# Altium PCB MAX96724_EVB_revB.PcbDoc (part 1 of 2)
Units mm, origin at the board's own origin, x right, y up, seen from the top; angles counter-clockwise.
Board outline 80 x 80 mm, 4 copper layers (Top Layer, Mid Layer 1, Mid Layer 2, Bottom Layer), stack 1.586 mm thick; 167 components, 106 nets, 496 pads, 209 vias.
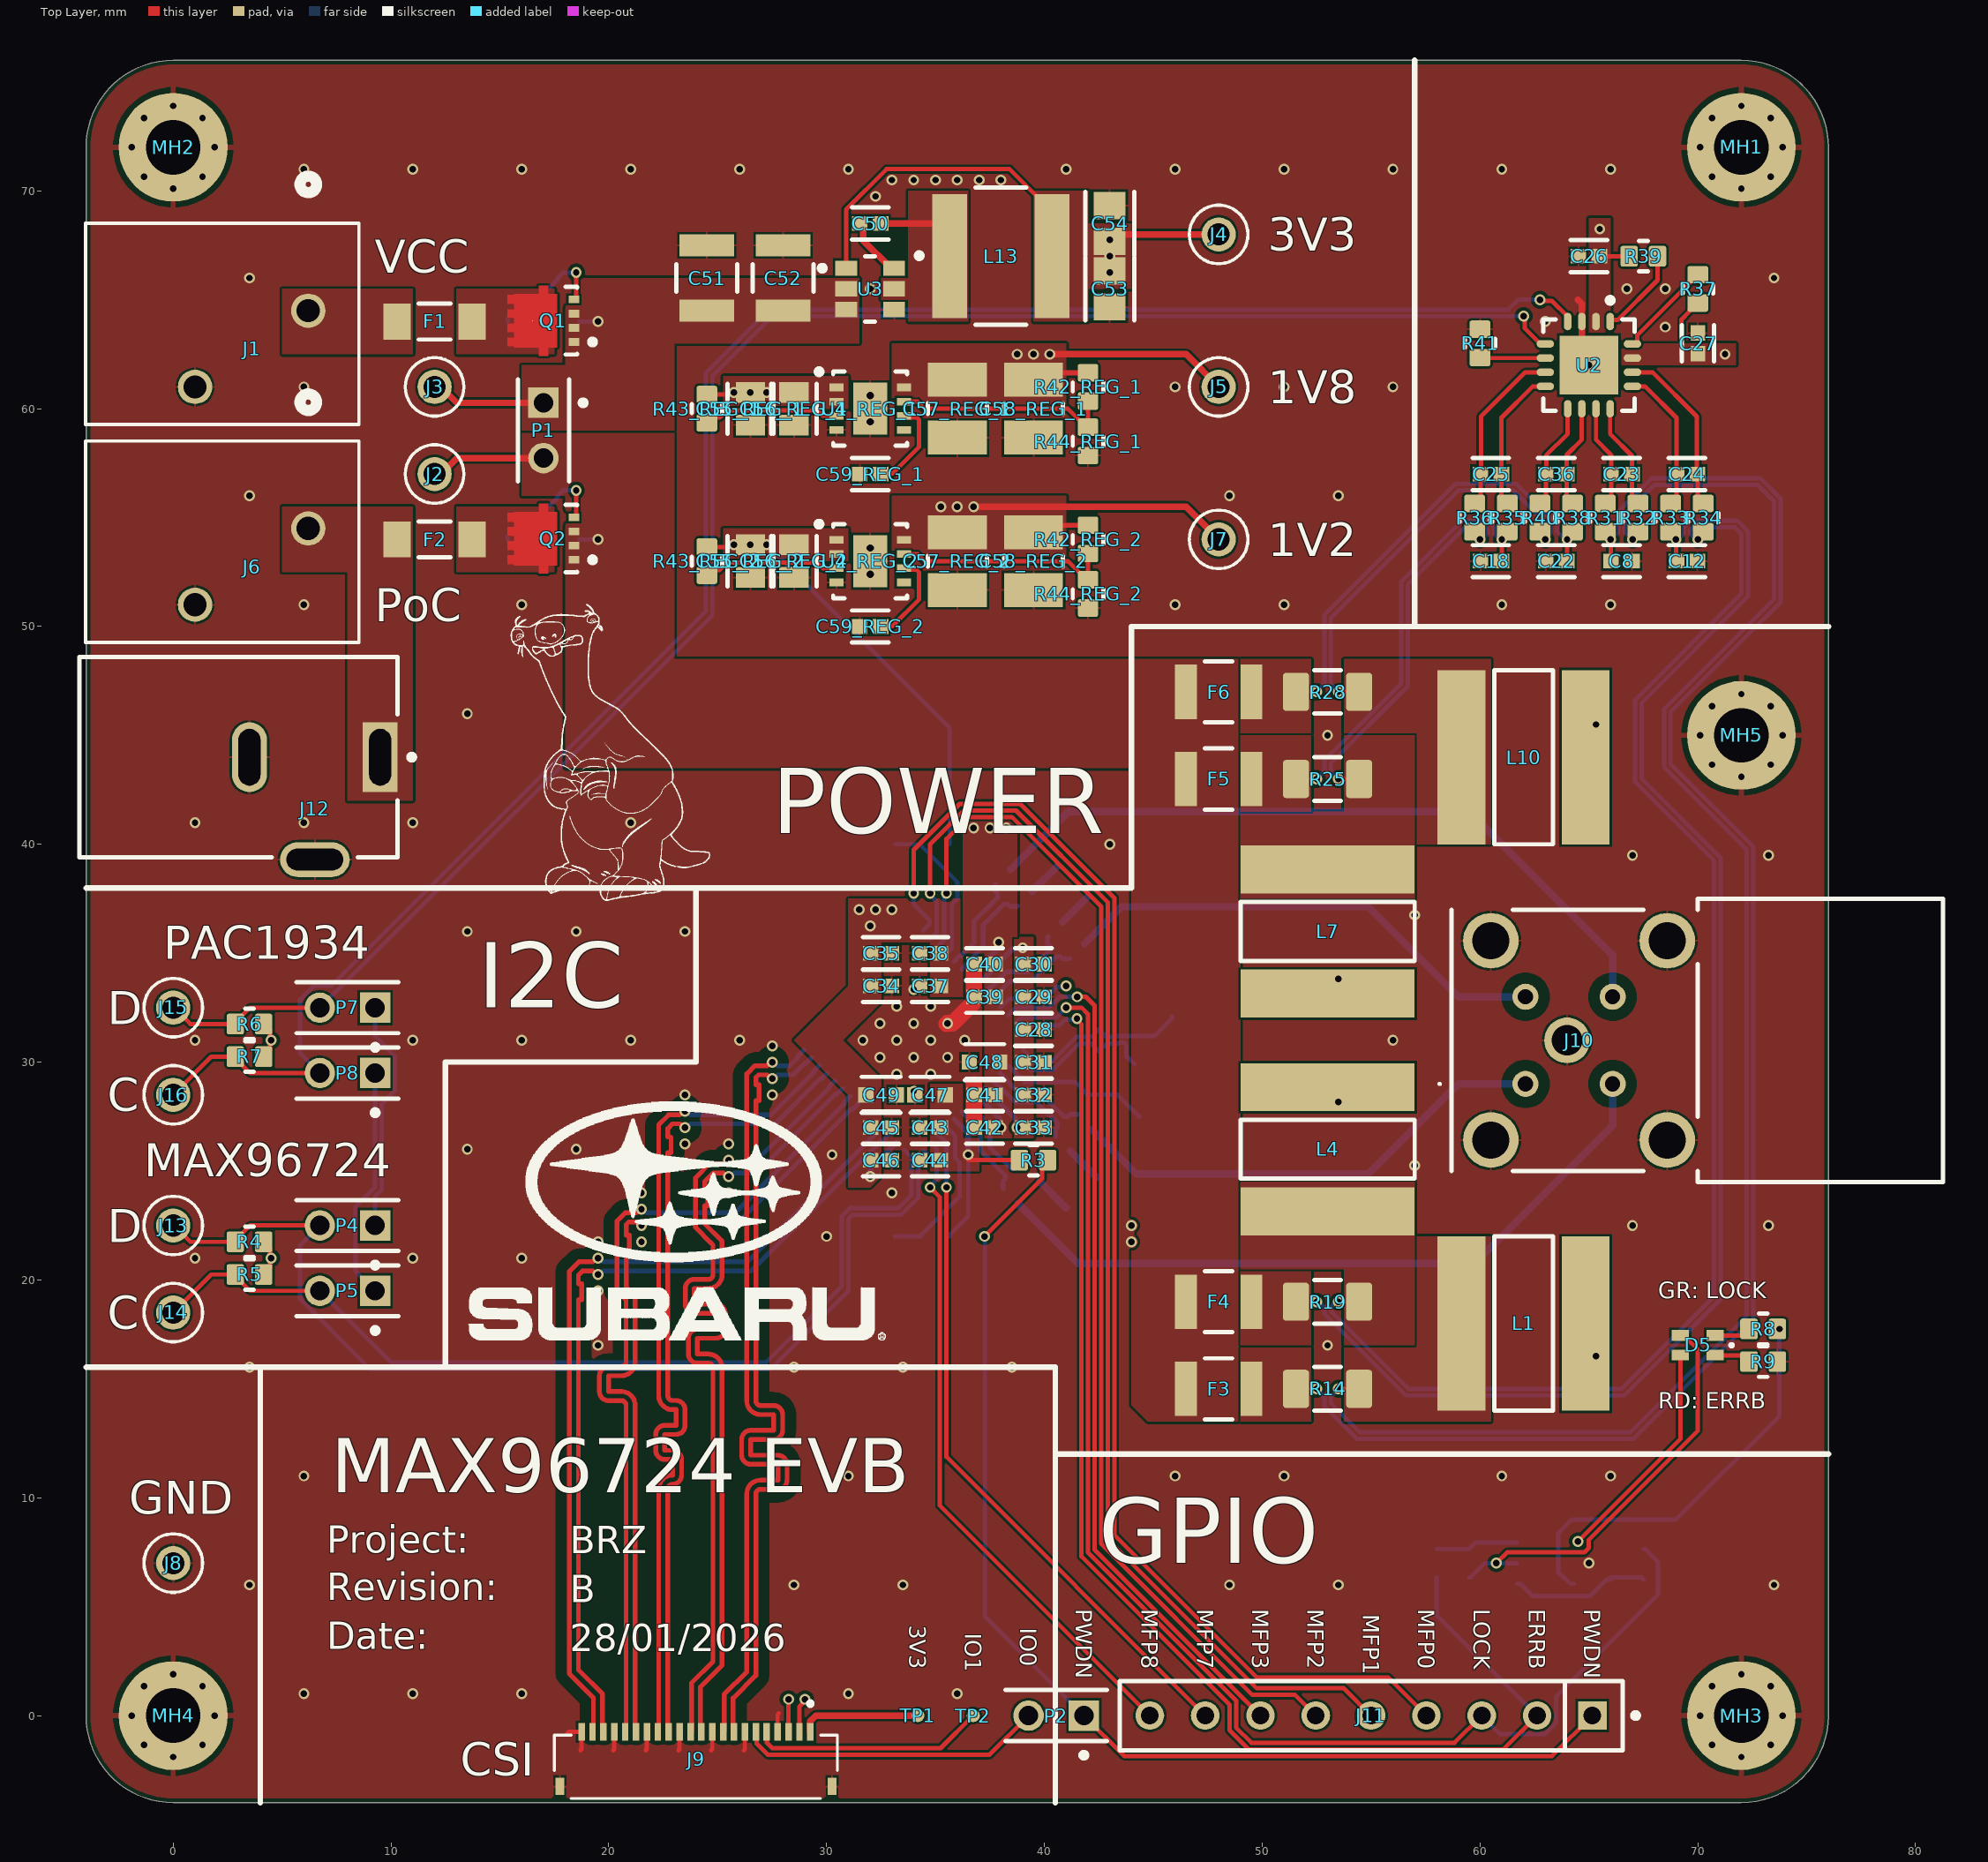
[diagram p0: Top Layer view]
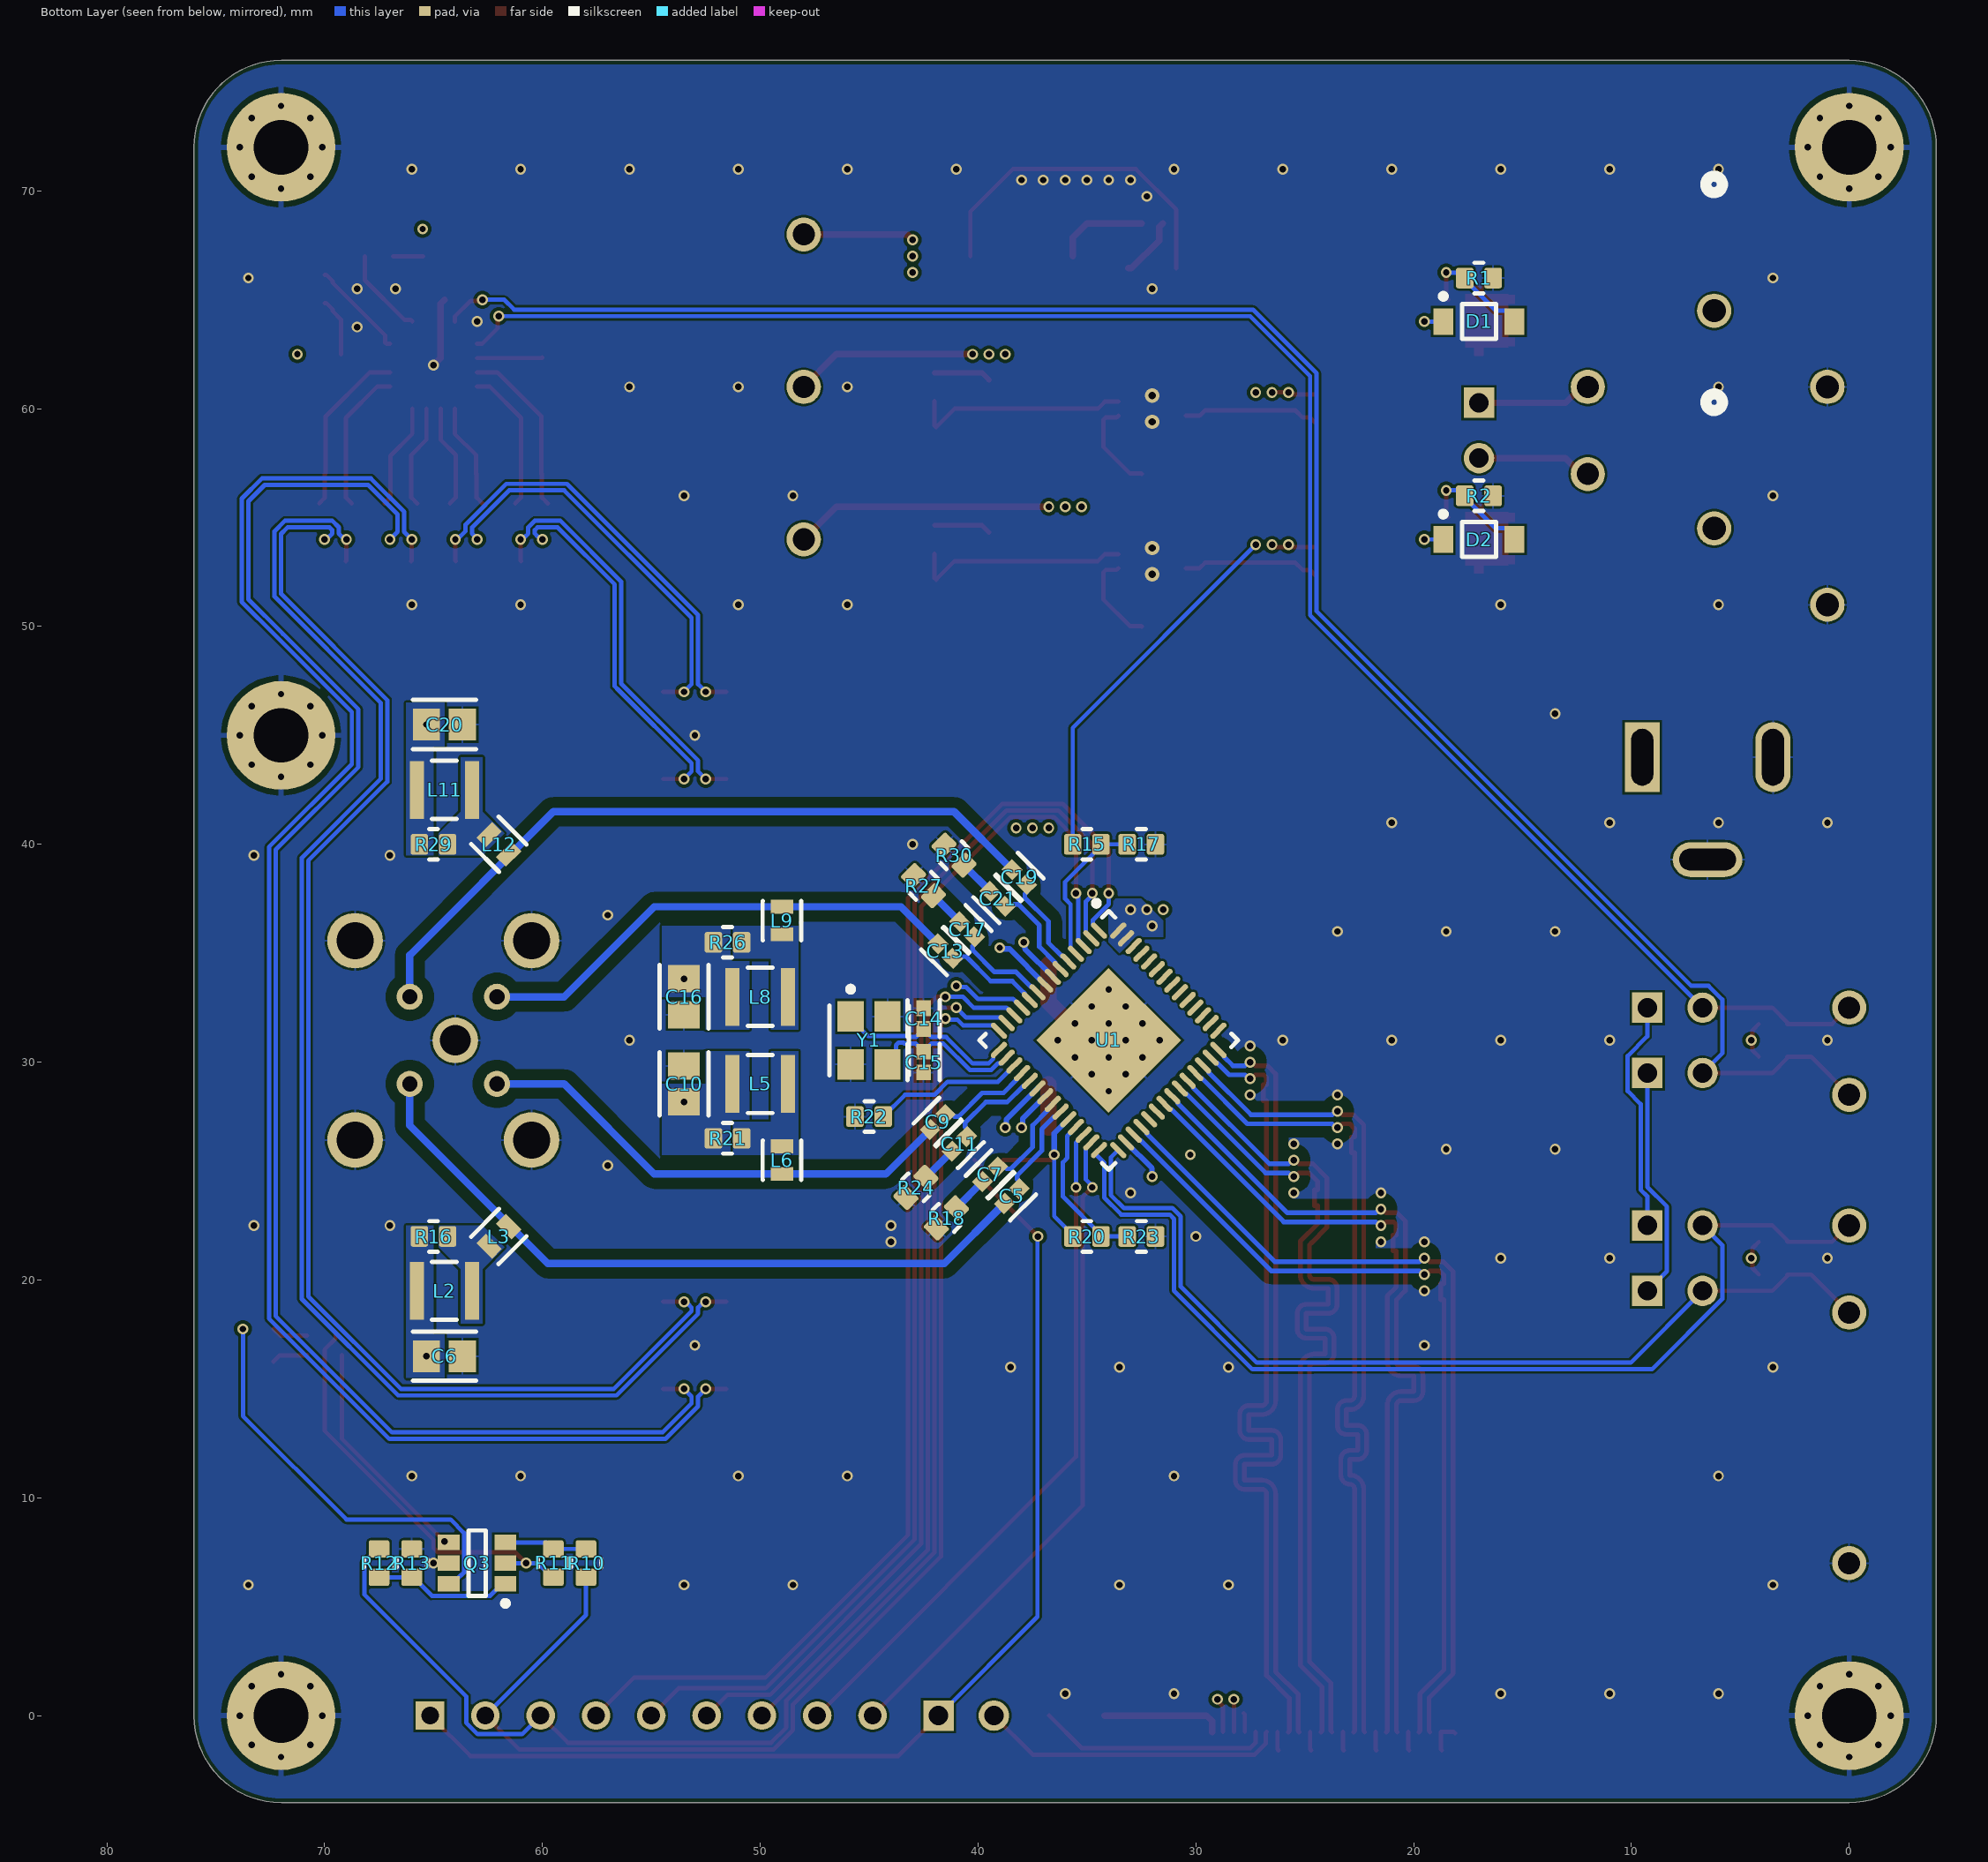
[diagram p1: Bottom Layer view, seen from below]
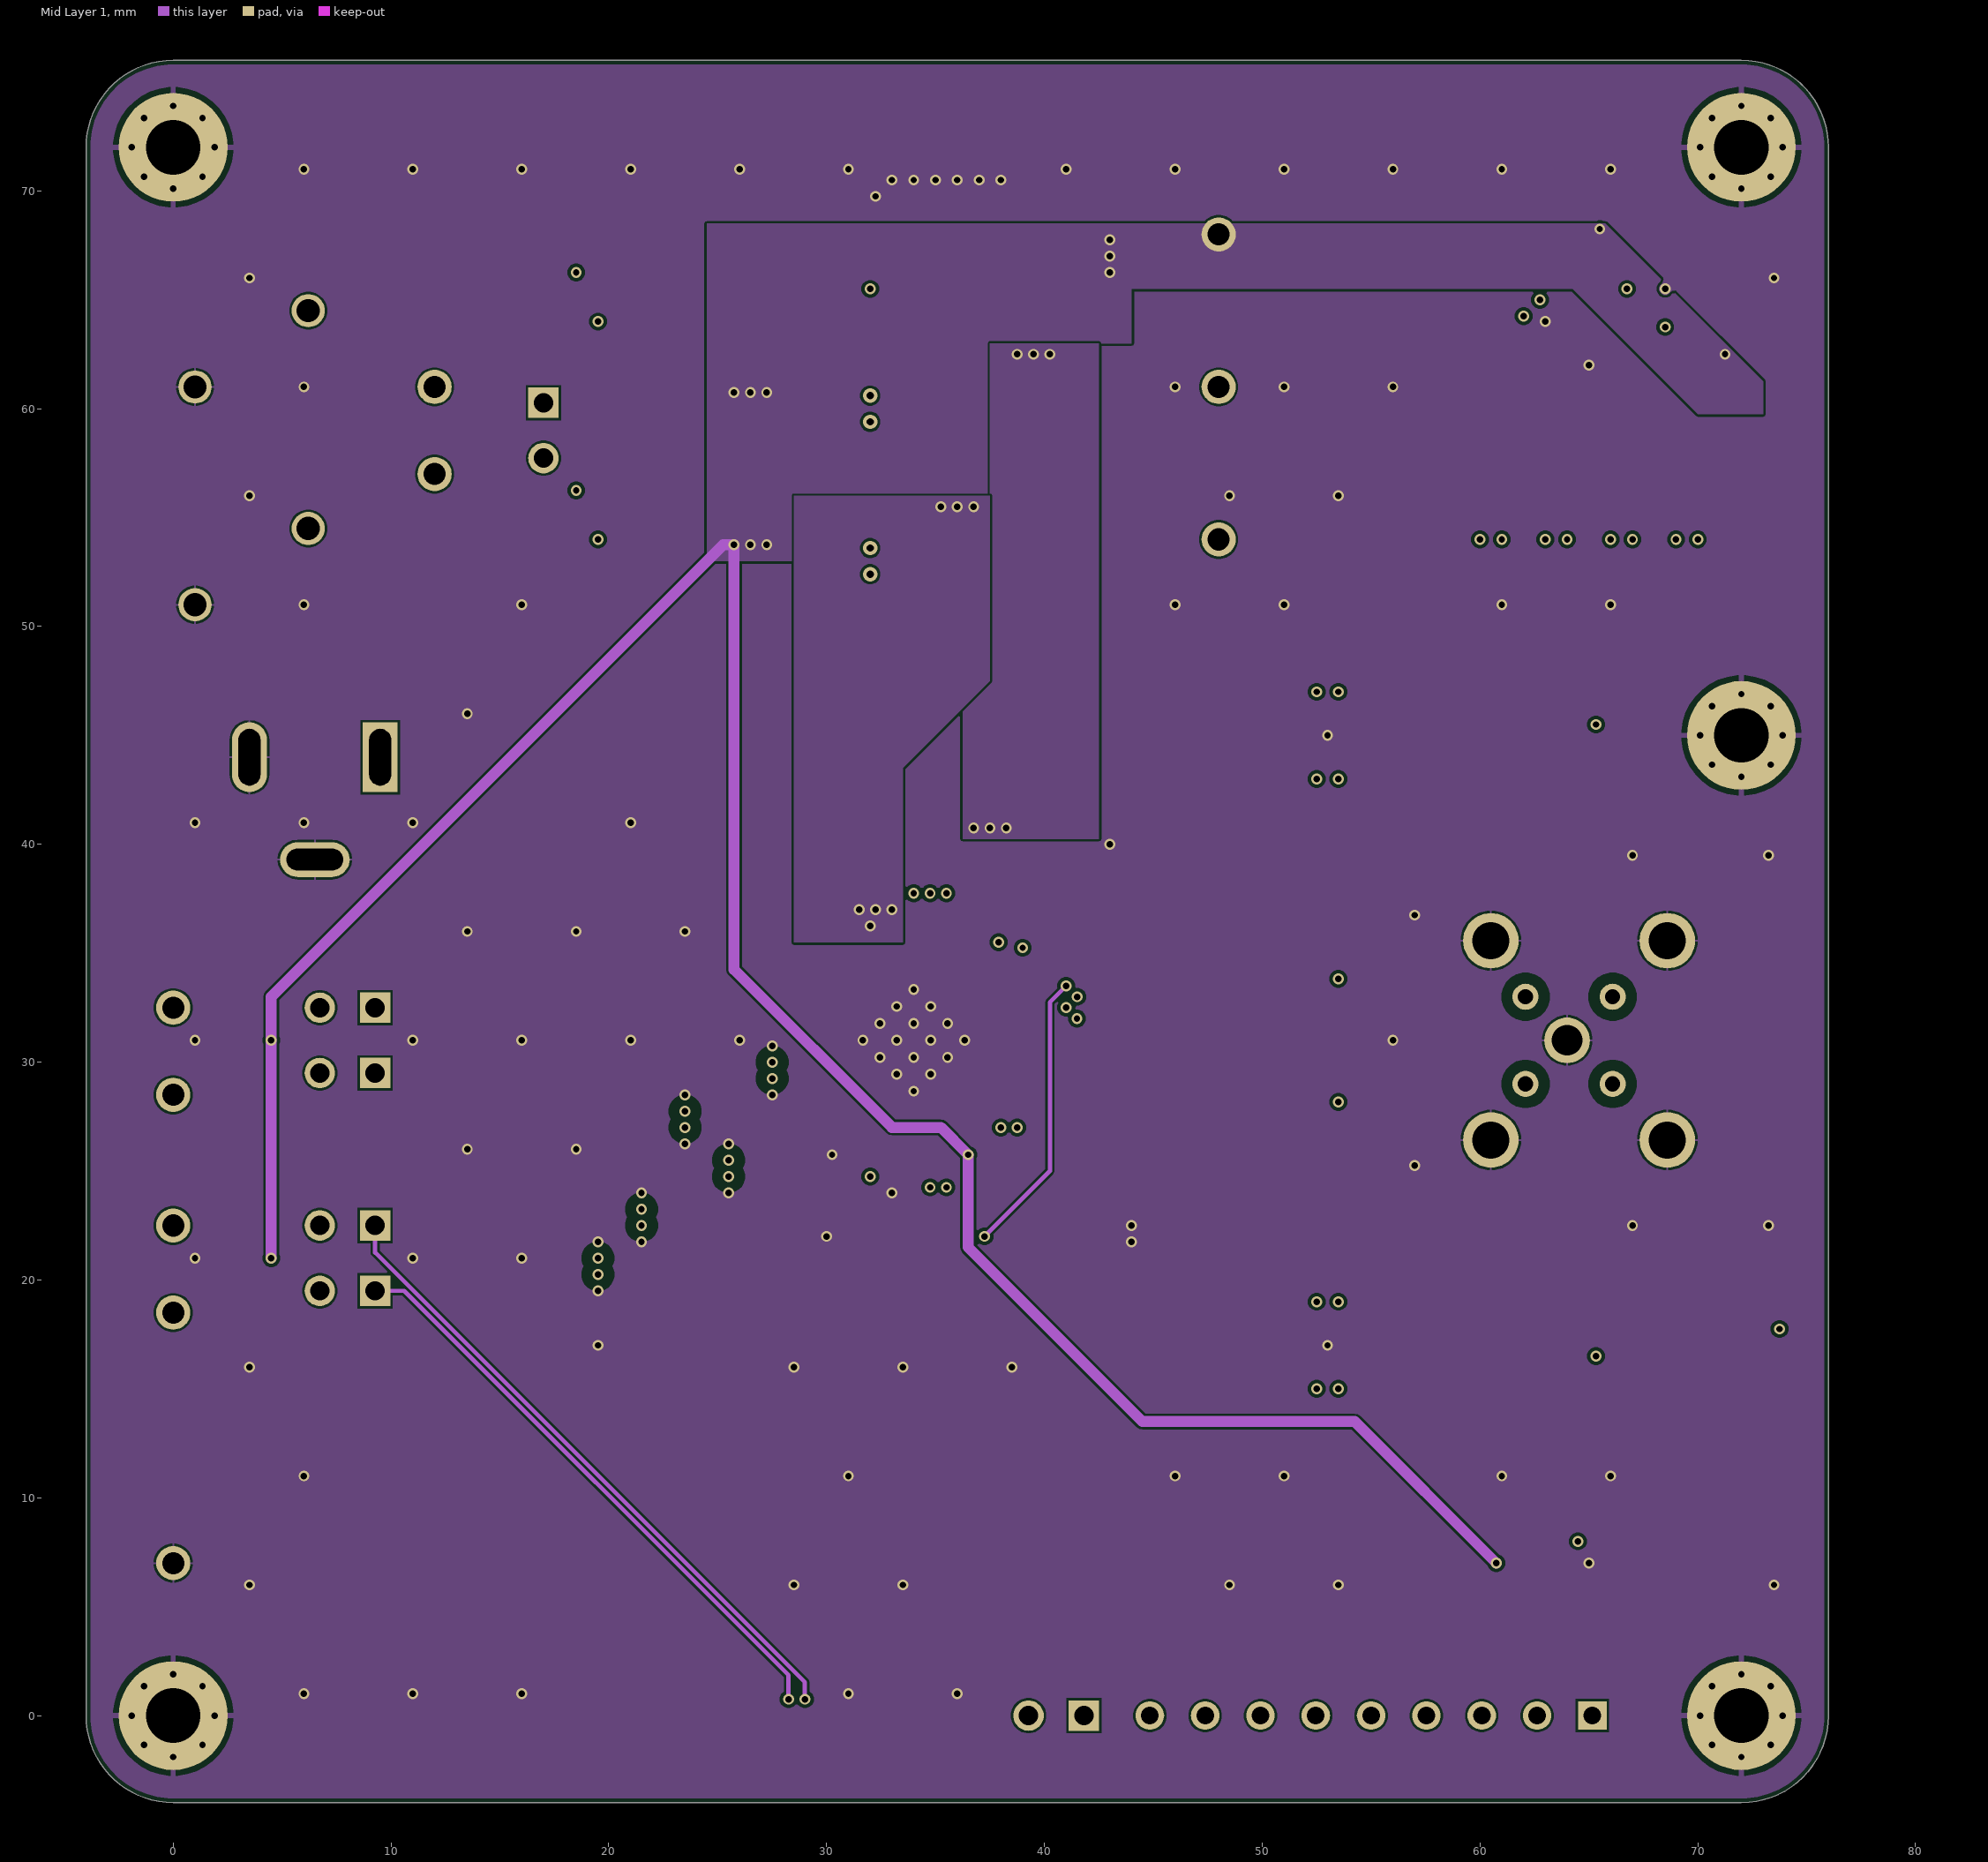
[diagram p2: Mid Layer 1]
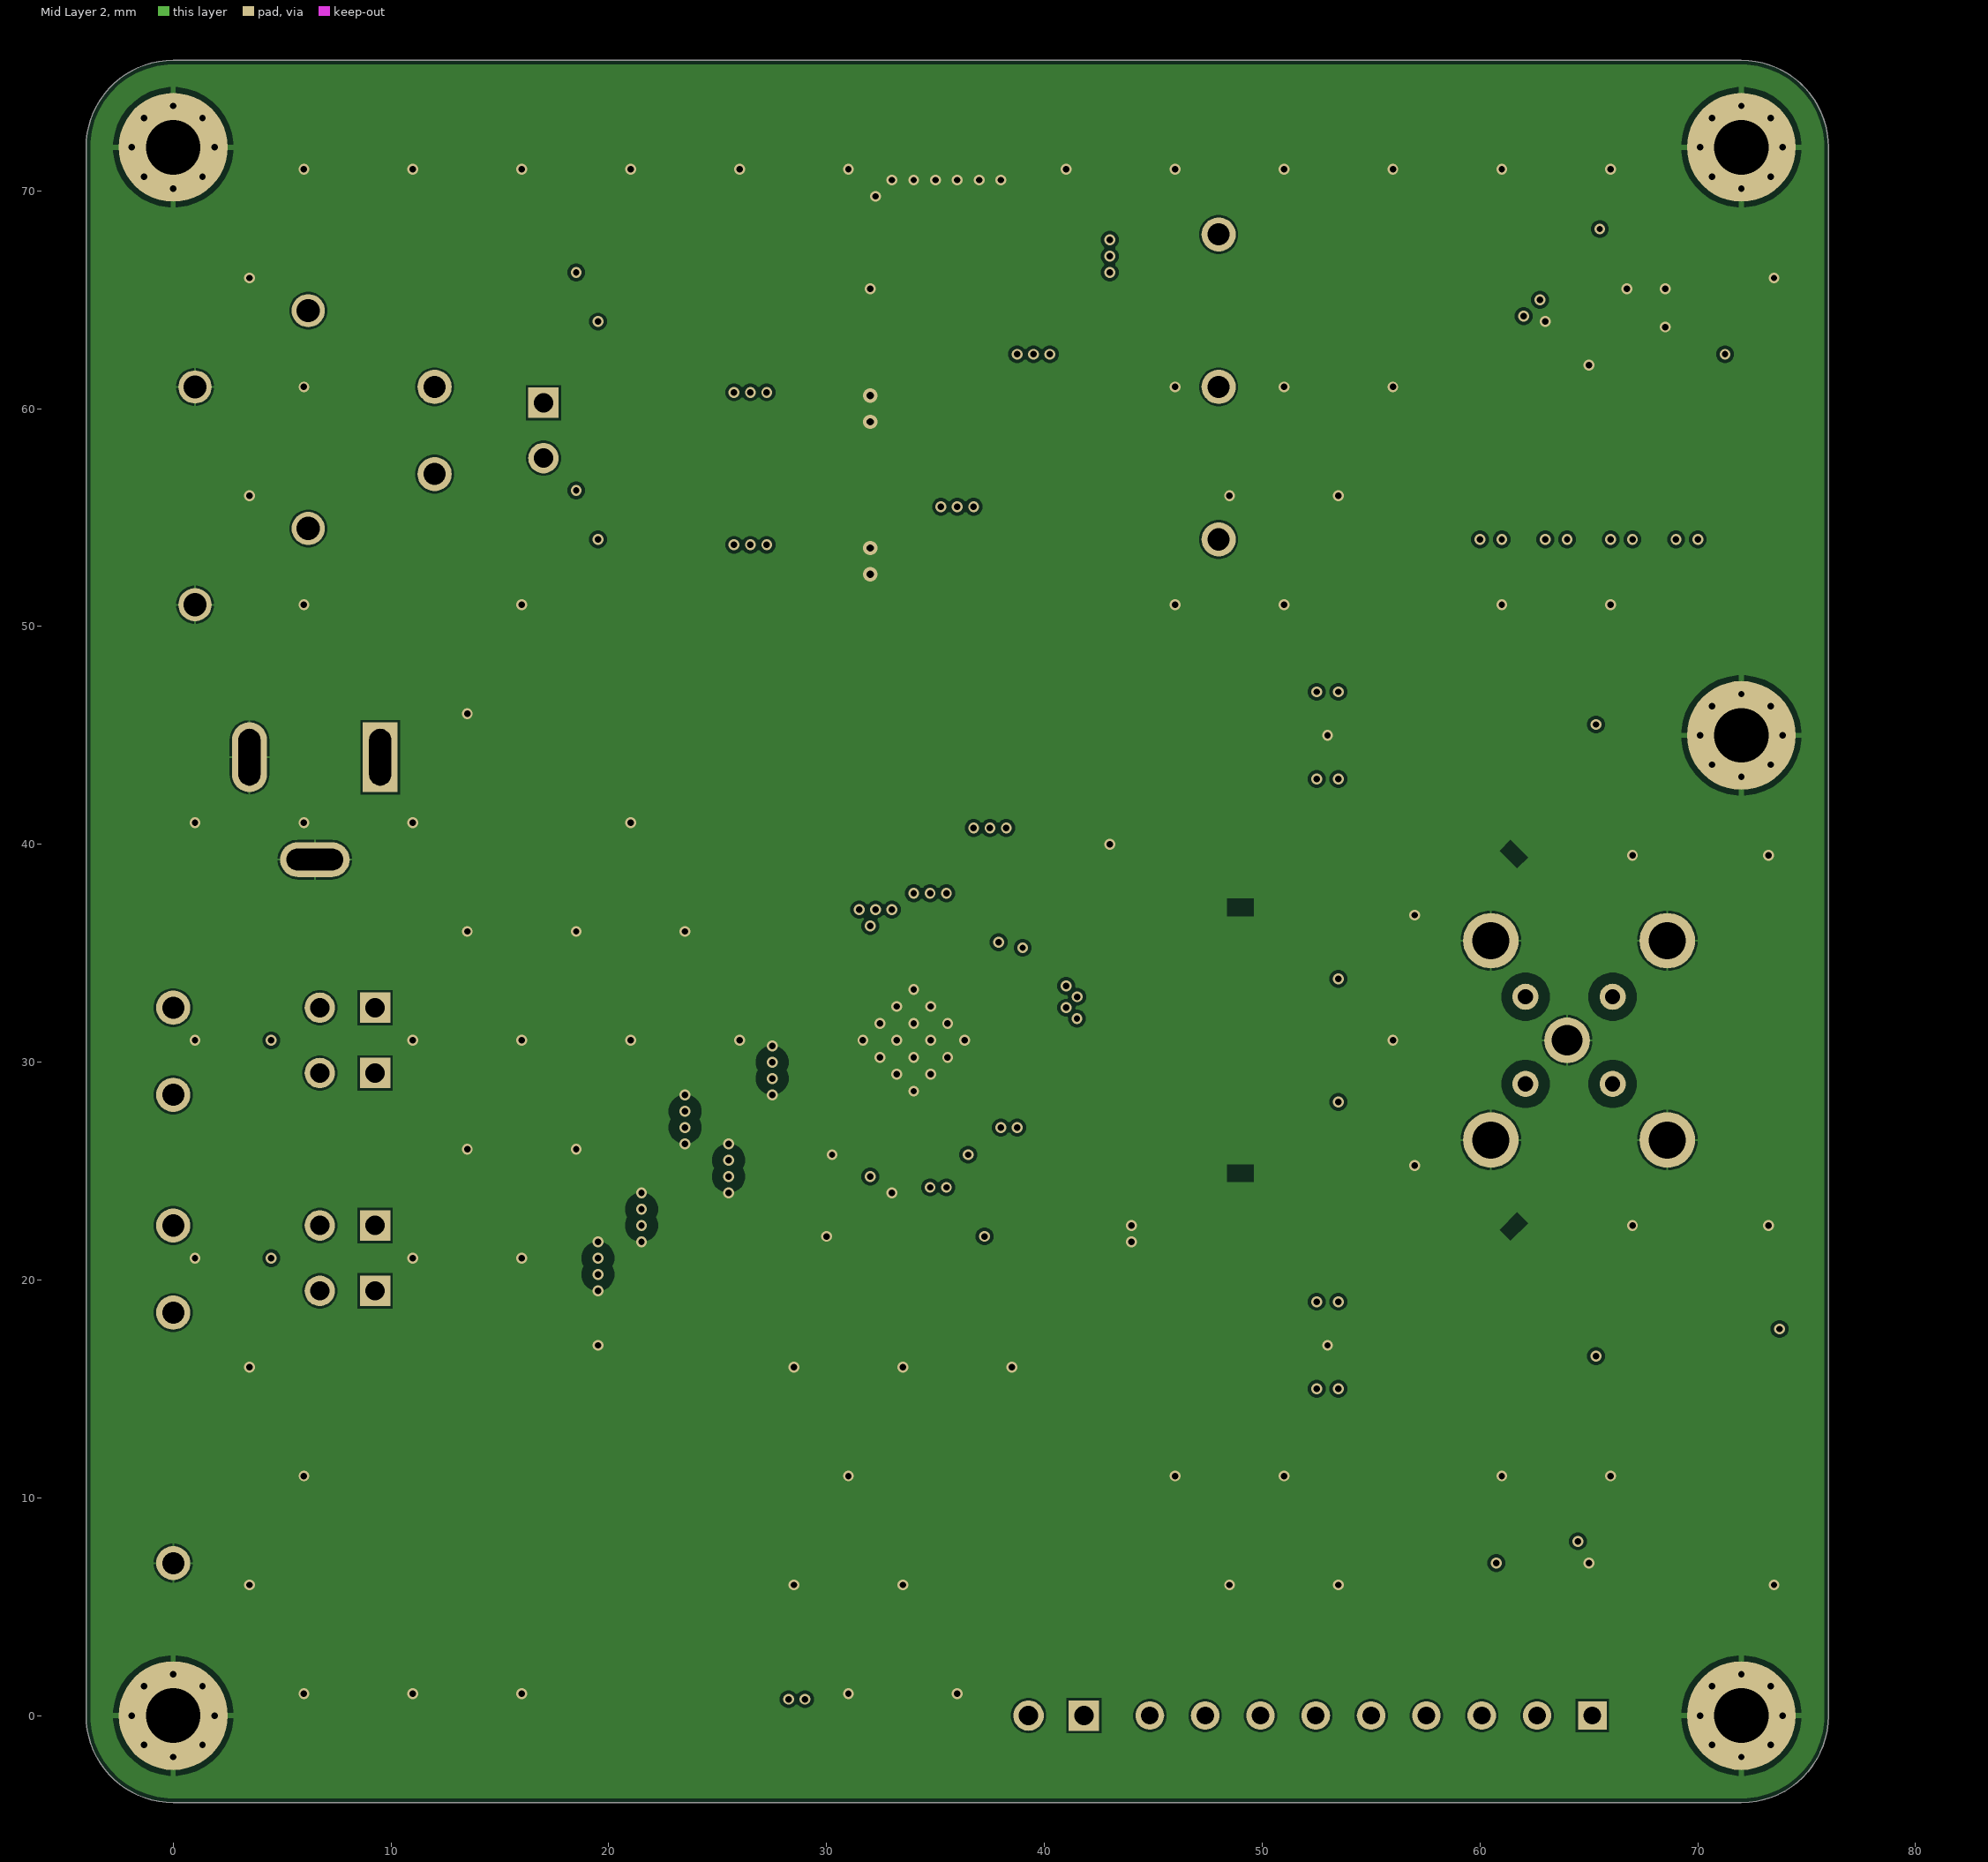
[diagram p3: Mid Layer 2]
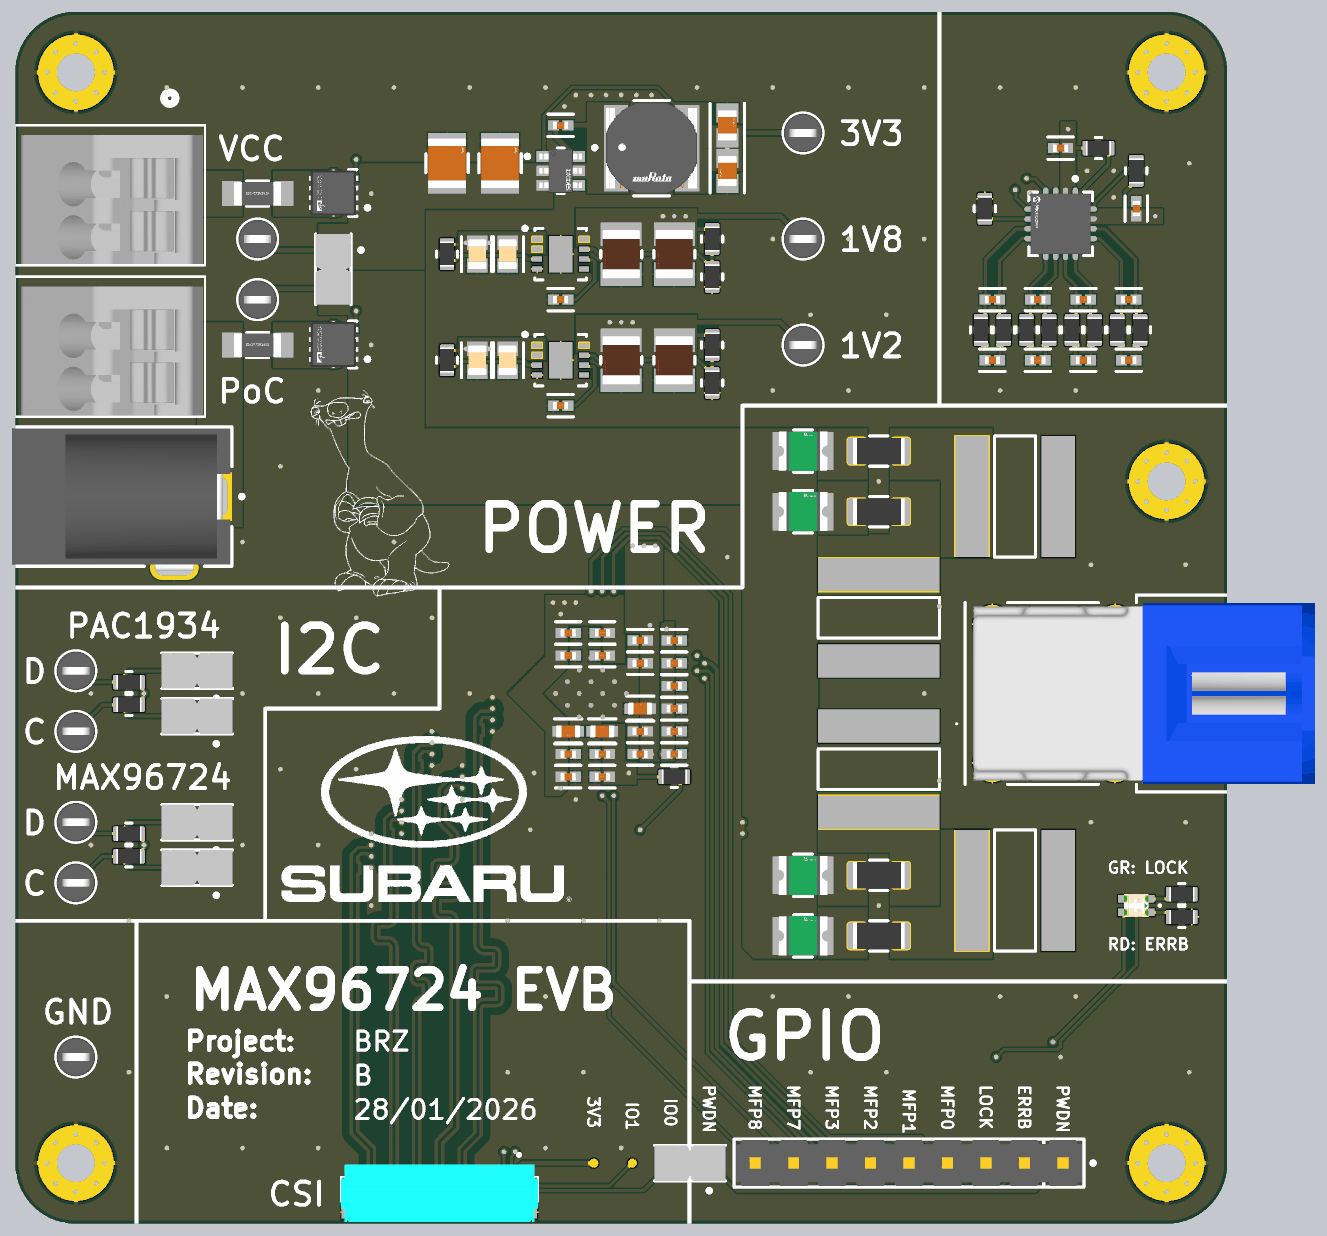
[diagram p5: 3D render of the assembled board from above, using the file's embedded part models]
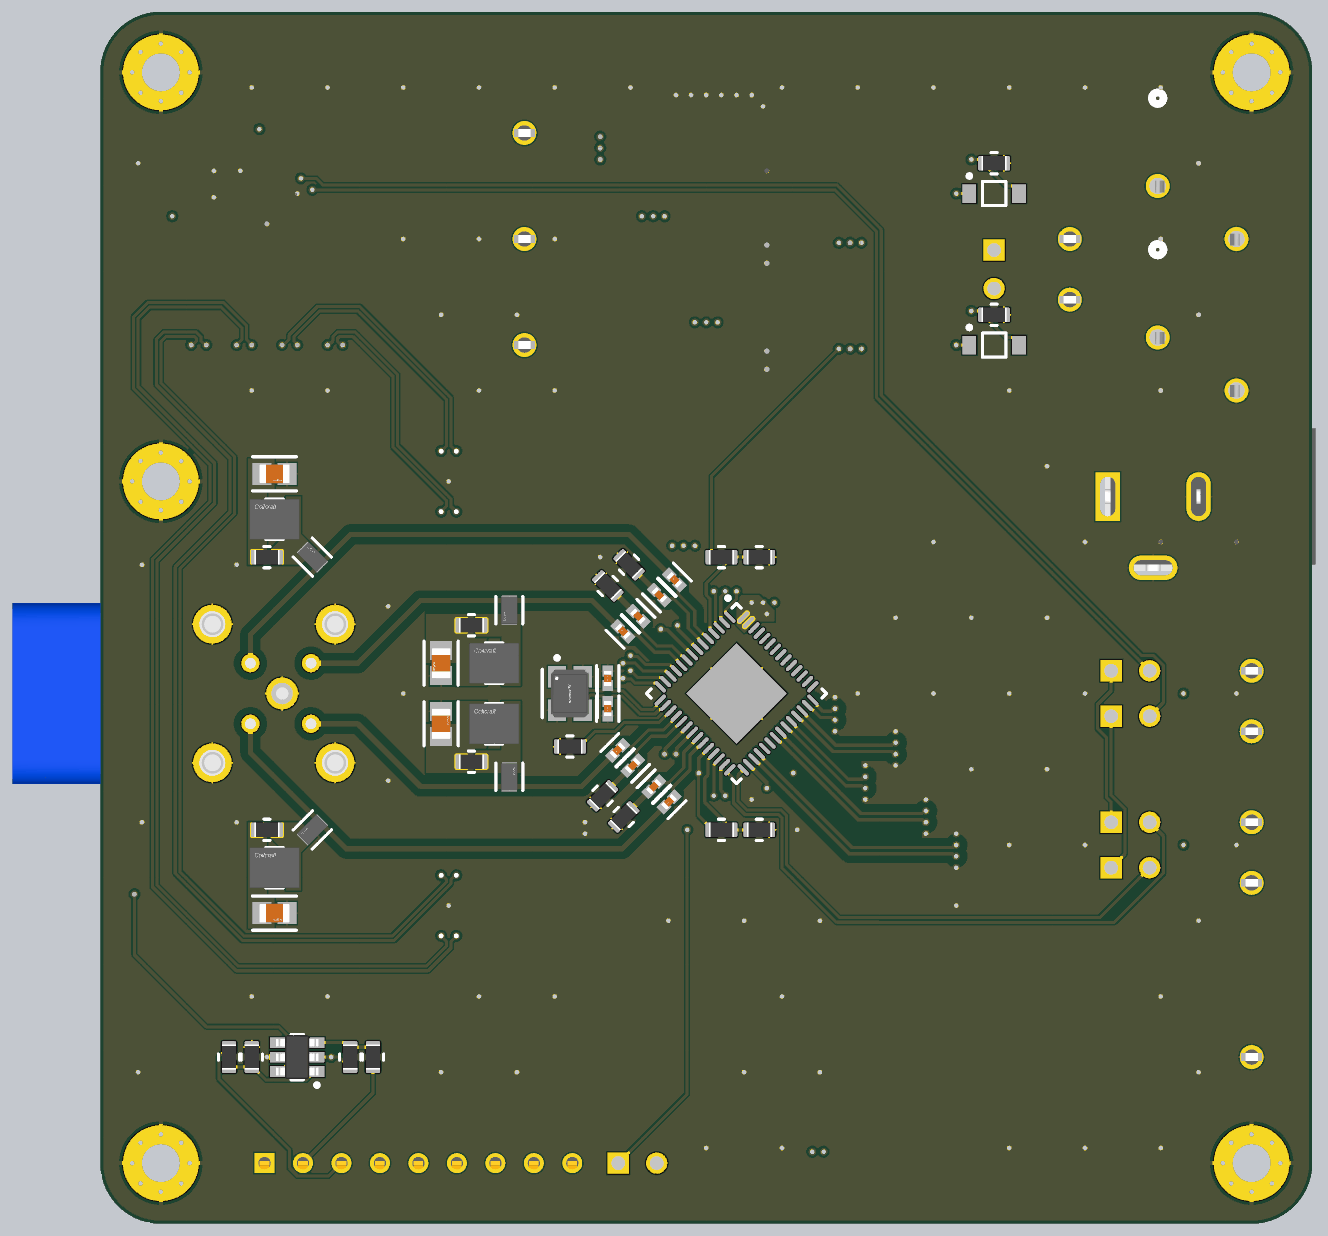
[diagram p6: 3D render of the assembled board from below, using the file's embedded part models]

## Layer stack, top to bottom
Top Solder: solder mask 0.0127, Solder Resist, Dk 3.8
Top Layer: signal copper 0.035
Dielectric 1: prepreg 0.2104, 7628, Dk 4.6
Mid Layer 1: signal copper 0.0152
Core: core 1.065, FR-4, Dk 4.5
Mid Layer 2: signal copper 0.0152
Dielectric 2: prepreg 0.2104, 7628, Dk 4.6
Bottom Layer: signal copper 0.035
Bottom Solder: solder mask 0.0127, Solder Resist, Dk 3.8

## Board outline
-4,0 -4,72 cw(c0,72) 0,76 72,76 cw(c72,72) 76,72 76,0 cw(c72,0) 72,-4 0,-4 cw(c0,0)

## Design rules (kind name [scope] priority, off if disabled: settings)
BoardOutlineClearance [All] p1: gap=0.2 ignorepadtopadclearanceinfootprint=FALSE
Clearance "IMPEDANCE CLEARANCE" [InNetClass('50SINGLE') or InDifferentialPairClass('100DIFF') or InDifferentialPairClass('CSIA') vs InNet('GND') AND (Name <> 'J9')] p1: gap=0.102 ignorepadtopadclearanceinfootprint=FALSE except(0.5: Arc-Poly Track-Poly THPad-Poly Via-Poly Fill-Poly Poly-Poly)
Clearance [All] p2: gap=0.102 ignorepadtopadclearanceinfootprint=FALSE except(0.127: Arc-Via Track-Via SMDPad-Via THPad-Via Via-Via Via-Fill Via-Poly Via-Region Via-Text; 0.25: Arc-Hole Track-Hole SMDPad-Hole THPad-Hole Via-Hole Fill-Hole Poly-Hole Region-Hole Text-Hole)
ComponentClearance [All] p1: gap=0.102 collisioncheckmode=3 verticalgap=0.102 showdistances=TRUE
DiffPairsRouting 100OHM [InDifferentialPairClass('100DIFF') or InDifferentialPairClass('CSIA')] p1: maxlimit=0.2 minlimit=0.127 mostfreqgap=0.2 toplayer_mingap=0.2 toplayer_minwidth=0.217 toplayer_maxwidth=0.217 toplayer_prefwidth=0.217 midlayer1_maxgap=0.127 midlayer1_prefgap=0.127 midlayer1_minwidth=0.09 midlayer1_maxwidth=0.09 midlayer1_prefwidth=0.09 midlayer2_maxgap=0.127 midlayer2_prefgap=0.127 midlayer2_minwidth=0.09 midlayer2_maxwidth=0.09 midlayer2_prefwidth=0.09 bottomlayer_mingap=0.2 bottomlayer_minwidth=0.217 bottomlayer_maxwidth=0.217 bottomlayer_prefwidth=0.217 impedanceprofiledriven=TRUE impedanceprofileid={A469C6C3-38A5-4A5F-B998-4C3987260FDD} impedanceprofilevalue=100.000000 maxuncoupledlength=12.7
DiffPairsRouting [All] p2: maxlimit=0.102 minlimit=0.102 mostfreqgap=0.102 toplayer_minwidth=0.102 toplayer_maxwidth=1816.048 toplayer_prefwidth=0.2 midlayer1_minwidth=0.102 midlayer1_maxwidth=1816.048 midlayer1_prefwidth=0.2 midlayer2_minwidth=0.102 midlayer2_maxwidth=1816.048 midlayer2_prefwidth=0.2 bottomlayer_minwidth=0.102 bottomlayer_maxwidth=1816.048 bottomlayer_prefwidth=0.2 maxuncoupledlength=12.7
Height [All] p1: minheight=0 maxheight=1816.048 prefheight=12.7
HoleSize [All] p1: absolutevalues=TRUE maxlimit=6.3 minlimit=0.2 maxpercent=80.000 minpercent=20.000
HoleToHoleClearance [All] p1: gap=0.25 allowstackedmicrovias=FALSE
MatchedLengths CSI_INTRA_PAIR [InDifferentialPairClass('CSIA')] p1: tolerance=0.1 checknetsindiffpair=TRUE checkdiffpairvsdiffpair=FALSE checkxsignals=FALSE checkothers=FALSE
MatchedLengths CSI_INTER_PAIR [InDifferentialPairClass('CSIA')] p2: tolerance=0.11 checknetsindiffpair=FALSE checkdiffpairvsdiffpair=TRUE checkxsignals=TRUE checkothers=TRUE
MinimumAnnularRing [All] p1: minimumring=0.076
MinimumSolderMaskSliver [All] p1: minsoldermaskwidth=0
PlaneClearance [All] p1: clearance=0.102
PlaneConnect PlaneConnectPowerPads [InPadClass('PowerPads')] p1: planeconnectstyle=Direct reliefexpansion=0.508 reliefentries=4 reliefconductorwidth=0.254 reliefairgap=0.254
PlaneConnect [All] p2: pad.planeconnectstyle=Relief pad.reliefexpansion=0.3 pad.reliefentries=4 pad.reliefconductorwidth=0.102 pad.reliefairgap=0.102 via.planeconnectstyle=Direct via.reliefexpansion=0.3 via.reliefentries=4 via.reliefconductorwidth=0.127 via.reliefairgap=0.127
PolygonConnect PolygonConnectPowerPads [All vs InNetClass('PWR')] p1: connectstyle=Direct reliefconductorwidth=0.254 reliefentries=4 polygonreliefangle="90 Angle" airgapwidth=0.254
PolygonConnect [All] p2: thpad.connectstyle=Relief thpad.reliefconductorwidth=0.102 thpad.reliefentries=4 thpad.polygonreliefangle="90 Angle" thpad.airgapwidth=0.102 smdpad.connectstyle=Relief smdpad.reliefconductorwidth=0.102 smdpad.reliefentries=4 smdpad.polygonreliefangle="90 Angle" smdpad.airgapwidth=0.102 via.connectstyle=Direct via.reliefconductorwidth=0.127 via.reliefentries=4 via.polygonreliefangle="90 Angle" via.airgapwidth=0.127
RoutingVias [All] p1: holewidth=0.2 width=0.45 viastyle="Through Hole" minholewidth=0.2 minwidth=0.45 maxholewidth=6.3 maxwidth=6.55
SilkToSilkClearance [All] p1: silktosilkclearance=0
SilkToSolderMaskClearance [IsPad] p1: minsilkscreentomaskgap=0.102 clearancetoexposedcopper=TRUE
SolderMaskExpansion [All] p1: expansion=0.075 istentingtop=FALSE
SupplyNets "Schematic Supply Nets_7" [InNet('PoC_VCC')] p1: voltage=0.000
SupplyNets "Schematic Supply Nets_6" [InNet('1V8')] p2: voltage=0.000
SupplyNets "Schematic Supply Nets_5" [InNet('3V3')] p3: voltage=0.000
SupplyNets "Schematic Supply Nets_4" [InNet('LO_VCC')] p4: voltage=0.000
SupplyNets "Schematic Supply Nets_3" [InNet('FPC_3V3')] p5: voltage=0.000
SupplyNets "Schematic Supply Nets_2" [InNet('1V2')] p6: voltage=0.000
SupplyNets "Schematic Supply Nets_1" [InNet('GND')] p7: voltage=0.000
Width Width_50OHM [InNetClass('50SINGLE')] p1: maxlimit=0.342 minlimit=0.177 preferedwidth=0.342 toplayer_minwidth=0.342 midlayer1_maxwidth=0.177 midlayer1_prefwidth=0.177 midlayer2_maxwidth=0.177 midlayer2_prefwidth=0.177 bottomlayer_minwidth=0.342 impedanceprofiledriven=TRUE impedanceprofileid={5DB8EDF1-D2C3-47D4-BBBD-E0A3F0656C9F} impedanceprofilevalue=50.000000 minimp=50.000000 maximp=50.000000 favimp=50.000000
Width [All] p2: maxlimit=1816.048 minlimit=0.102 preferedwidth=0.2
20 further rules are at their usual default settings.

## Classes and differential pairs
differential pair class CSIA: CSIA_CK CSIA_D0 CSIA_D1 CSIA_D2 CSIA_D3
differential pair class 100DIFF: SIOA SIOB SIOC SIOD
channel class ADJ_REG: REG_1 REG_2
net class PWR: 1V2 1V8 3V3 LO_VCC MAX96724_PoC_A_V_N MAX96724_PoC_A_V_P MAX96724_PoC_B_V_N MAX96724_PoC_B_V_P MAX96724_PoC_C_V_N MAX96724_PoC_C_V_P MAX96724_PoC_D_V_N MAX96724_PoC_D_V_P NetC6_1 NetC10_1 NetC16_1 NetC20_1 NetC28_2 NetC31_2 NetC50_2 NetF1_1 NetF1_2 NetF2_1 NetF2_2 NetL2_2 NetL5_2 NetL8_2 NetL11_2 PoC_VCC
net class 50SINGLE: NetC7_2 NetC11_2 NetC17_2 NetC21_2 RF_A RF_B RF_C RF_D
component class REG_2: C55_REG_2 C56_REG_2 C57_REG_2 C58_REG_2 C59_REG_2 R42_REG_2 R43_REG_2 R44_REG_2 U4_REG_2
component class REG_1: C55_REG_1 C56_REG_1 C57_REG_1 C58_REG_1 C59_REG_1 R42_REG_1 R43_REG_1 R44_REG_1 U4_REG_1
component class REG_0: C50 C51 C52 C53 C54 L13 U3
component class MAX96724_EVB_revB: D1 D2 D5 F1 F2 J1 J2 J3 J4 J5 J6 J7 J8 J9 J10 J11 J12 J13 J14 J15 J16 MH1 MH2 MH3 MH4 MH5 P1 P2 P4 P5 P7 P8 Q1 Q2 Q3 R1 R2 R3 R4 R5 R6 R7 R8 R9 R10 R11 R12 R13 TP1 TP2
component class DES_0: C5 C6 C7 C8 C9 C10 C11 C12 C13 C14 C15 C16 C17 C18 C19 C20 C21 C22 C23 C24 C25 C26 C27 C28 C29 C30 C31 C32 C33 C34 C35 C36 C37 C38 C39 C40 C41 C42 C43 C44 C45 C46 C47 C48 C49 F3 F4 F5 F6 L1 L2 L3 L4 L5 L6 L7 L8 L9 L10 L11 L12 R14 R15 R16 R17 R18 R19 R20 R21 R22 R23 R24 R25 R26 R27 R28 R29 R30 R31 R32 R33 R34 R35 R36 R37 R38 R39 R40 R41 U1 U2 Y1
differential pair X25: +X25_P -X25_N
differential pair SIOD: +SIOD_P -SIOD_N
differential pair SIOC: +SIOC_P -SIOC_N
differential pair SIOB: +SIOB_P -SIOB_N
differential pair SIOA: +SIOA_P -SIOA_N
differential pair MAX96724_PoC_D_V: +MAX96724_PoC_D_V_P -MAX96724_PoC_D_V_N
differential pair MAX96724_PoC_C_V: +MAX96724_PoC_C_V_P -MAX96724_PoC_C_V_N
differential pair MAX96724_PoC_B_V: +MAX96724_PoC_B_V_P -MAX96724_PoC_B_V_N
differential pair MAX96724_PoC_A_V: +MAX96724_PoC_A_V_P -MAX96724_PoC_A_V_N
differential pair CSIA_D3: +CSIA_D3_P -CSIA_D3_N
differential pair CSIA_D2: +CSIA_D2_P -CSIA_D2_N
differential pair CSIA_D1: +CSIA_D1_P -CSIA_D1_N
differential pair CSIA_D0: +CSIA_D0_P -CSIA_D0_N
differential pair CSIA_CK: +CSIA_CK_P -CSIA_CK_N

## Components (designator, comment, footprint, x,y, rotation, side; value= is the part's Value field where it differs from the comment)
C5 "100n" FP-0402-L_1_0_0_05-W_0_5-IPC_A 38.45,23.85 r315 bottom
C6 "GRM21BR61E226ME44L" FP-GRM21B-0_2-e0_2_0_7-IPC_B 64.5,16.5 r180 bottom
C7 "100n" FP-0402-L_1_0_0_05-W_0_5-IPC_A 39.45,24.85 r315 bottom
C8 "100n" FP-0402-L_1_0_0_05-W_0_5-IPC_A 66.5,53 r180 top
C9 "100n" FP-0402-L_1_0_0_05-W_0_5-IPC_A 41.85,27.25 r315 bottom
C10 "GRM21BR61E226ME44L" FP-GRM21B-0_2-e0_2_0_7-IPC_B 53.5,29 r90 bottom
C11 "100n" FP-0402-L_1_0_0_05-W_0_5-IPC_A 40.85,26.25 r315 bottom
C12 "100n" FP-0402-L_1_0_0_05-W_0_5-IPC_A 69.5,53 r180 top
C13 "100n" FP-0402-L_1_0_0_05-W_0_5-IPC_A 41.5,35.1 r45 bottom
C14 "30p" FP-0402-L_1_0_0_05-W_0_5-IPC_A 42.5,32 r270 bottom
C15 "30p" FP-0402-L_1_0_0_05-W_0_5-IPC_A 42.5,30 r90 bottom
C16 "GRM21BR61E226ME44L" FP-GRM21B-0_2-e0_2_0_7-IPC_B 53.5,33 r270 bottom
C17 "100n" FP-0402-L_1_0_0_05-W_0_5-IPC_A 40.5,36.1 r45 bottom
C18 "100n" FP-0402-L_1_0_0_05-W_0_5-IPC_A 60.5,53 r0 top
C19 "100n" FP-0402-L_1_0_0_05-W_0_5-IPC_A 38.1,38.5 r45 bottom
C20 "GRM21BR61E226ME44L" FP-GRM21B-0_2-e0_2_0_7-IPC_B 64.5,45.5 r180 bottom
C21 "100n" FP-0402-L_1_0_0_05-W_0_5-IPC_A 39.1,37.5 r45 bottom
C22 "100n" FP-0402-L_1_0_0_05-W_0_5-IPC_A 63.5,53 r0 top
C23 "DNP" FP-0402-L_1_0_0_05-W_0_5-IPC_A 66.5,57 r180 top
C24 "DNP" FP-0402-L_1_0_0_05-W_0_5-IPC_A 69.5,57 r180 top
C25 "DNP" FP-0402-L_1_0_0_05-W_0_5-IPC_A 60.5,57 r0 top
C26 "100n" FP-0402-L_1_0_0_05-W_0_5-IPC_A 65,67 r0 top
C27 "100n" FP-0402-L_1_0_0_05-W_0_5-IPC_A 70,63 r270 top
C28 "10u" FP-0402-L_1_0_0_05-W_0_5-IPC_A 39.5,31.5 r180 top
C29 "100n" FP-0402-L_1_0_0_05-W_0_5-IPC_A 39.5,33 r180 top
C30 "100n" FP-0402-L_1_0_0_05-W_0_5-IPC_A 39.5,34.5 r180 top
C31 "10u" FP-0402-L_1_0_0_05-W_0_5-IPC_A 39.5,30 r180 top
C32 "100n" FP-0402-L_1_0_0_05-W_0_5-IPC_A 39.5,28.5 r180 top
C33 "100n" FP-0402-L_1_0_0_05-W_0_5-IPC_A 39.5,27 r180 top
C34 "100n" FP-0402-L_1_0_0_05-W_0_5-IPC_A 32.5,33.5 r180 top
C35 "10n" FP-0402-L_1_0_0_05-W_0_5-IPC_A 32.5,35 r180 top
C36 "DNP" FP-0402-L_1_0_0_05-W_0_5-IPC_A 63.5,57 r0 top
C37 "100n" FP-0402-L_1_0_0_05-W_0_5-IPC_A 34.75,33.5 r0 top
C38 "10n" FP-0402-L_1_0_0_05-W_0_5-IPC_A 34.75,35 r0 top
C39 "100n" FP-0402-L_1_0_0_05-W_0_5-IPC_A 37.25,33 r0 top
C40 "10n" FP-0402-L_1_0_0_05-W_0_5-IPC_A 37.25,34.5 r0 top
C41 "100n" FP-0402-L_1_0_0_05-W_0_5-IPC_A 37.25,28.5 r0 top
C42 "10n" FP-0402-L_1_0_0_05-W_0_5-IPC_A 37.25,27 r0 top
C43 "100n" FP-0402-L_1_0_0_05-W_0_5-IPC_A 34.75,27 r0 top
C44 "10n" FP-0402-L_1_0_0_05-W_0_5-IPC_A 34.75,25.5 r0 top
C45 "100n" FP-0402-L_1_0_0_05-W_0_5-IPC_A 32.5,27 r180 top
C46 "10n" FP-0402-L_1_0_0_05-W_0_5-IPC_A 32.5,25.5 r180 top
C47 "EMK107BBJ106MA-T" FP-0603-L_1_6_0_2-W_0_8_0-MFG 34.75,28.5 r180 top
C48 "EMK107BBJ106MA-T" FP-0603-L_1_6_0_2-W_0_8_0-MFG 37.25,30 r180 top
C49 "EMK107BBJ106MA-T" FP-0603-L_1_6_0_2-W_0_8_0-MFG 32.5,28.5 r0 top
C50 "100n" FP-0402-L_1_0_0_05-W_0_5-IPC_A 32,68.5 r0 top
C51 "12103D106KAT2A" FP-1210-L_3_3_0_4-W_2_5_0-MFG 24.5,66 r90 top
C52 "DNP" FP-1210-L_3_3_0_4-W_2_5_0-MFG 28,66 r90 top
C53 "GRM21BR61E226ME44L" FP-GRM21B-0_2-e0_2_0_7-IPC_B 43,65.5 r270 top
C54 "GRM21BR61E226ME44L" FP-GRM21B-0_2-e0_2_0_7-IPC_B 43,68.5 r90 top
C55_REG_1 "C0805C475J4RACAUTO" FP-C0805C475J4RACAUTO-MFG 26.5,60 r270 top (schematic designator C55)
C55_REG_2 "C0805C475J4RACAUTO" FP-C0805C475J4RACAUTO-MFG 26.5,53 r270 top (schematic designator C55)
C56_REG_1 "DNP" FP-C0805C475J4RACAUTO-MFG 28.5,60 r270 top (schematic designator C56)
C56_REG_2 "DNP" FP-C0805C475J4RACAUTO-MFG 28.5,53 r270 top (schematic designator C56)
C57_REG_1 "HMK325B7105KN-T" FP-1210-L_3_2_0_3-W_2_5_0-IPC_B 36,60 r270 top (schematic designator C57)
C57_REG_2 "HMK325B7105KN-T" FP-1210-L_3_2_0_3-W_2_5_0-IPC_B 36,53 r270 top (schematic designator C57)
C58_REG_1 "DNP" FP-1210-L_3_2_0_3-W_2_5_0-IPC_B 39.5,60 r270 top (schematic designator C58)
C58_REG_2 "DNP" FP-1210-L_3_2_0_3-W_2_5_0-IPC_B 39.5,53 r270 top (schematic designator C58)
C59_REG_1 "DNP" FP-0402-L_1_0_0_05-W_0_5-IPC_A 32,57 r180 top (schematic designator C59)
C59_REG_2 "DNP" FP-0402-L_1_0_0_05-W_0_5-IPC_A 32,50 r180 top (schematic designator C59)
D1 "MMSZ5242BT1G" ONSC-SOD-123-2-425-04_V 17,64 r180 bottom
D2 "MMSZ5242BT1G" ONSC-SOD-123-2-425-04_V 17,54 r180 bottom
D5 "150066RG54050" WL-SBCD_0606 70,17 r270 top
F1 "1A" FP-SF-1206FP-MFG 12,64 r0 top
F2 "1A" FP-SF-1206FP-MFG 12,54 r0 top
F3 "1210L050YR" FP-1210L050YR-MFG 48,15 r0 top
F4 "1210L050YR" FP-1210L050YR-MFG 48,19 r0 top
F5 "1210L050YR" FP-1210L050YR-MFG 48,43 r0 top
F6 "1210L050YR" FP-1210L050YR-MFG 48,47 r0 top
J1 "1-2834011-2" 1-2834011-2-Footprint-1 6.2,64.5 r270 top
J2 "DNP" FP-5001-MFG 12,57 r0 top
J3 "DNP" FP-5001-MFG 12,61 r0 top
J4 "5001" FP-5001-MFG 48,68 r0 top
J5 "5001" FP-5001-MFG 48,61 r0 top
J6 "1-2834011-2" 1-2834011-2-Footprint-1 6.2,54.5 r270 top
J7 "5001" FP-5001-MFG 48,54 r0 top
J8 "5001" FP-5001-MFG 0,7 r0 top
J9 "FH34SRJ-22S-0.5SH(50)" FH34SRJ-22S-0.5SH(50)-Footprint-1 24,-2 r0 top
J10 "FM4-NZRP-PCB-1" FM4-NZRP-PCB-1-Footprint-1 64,31 r0 top
J11 "CES-109-01-G-S" FP-CES-109-01-G-S-MFG 55,0 r180 top
J12 "PJ-102A" FP-PJ-102A-MFG 3,44 r90 top
J13 "5001" FP-5001-MFG 0,22.5 r0 top
J14 "5001" FP-5001-MFG 0,18.5 r0 top
J15 "5001" FP-5001-MFG 0,32.5 r0 top
J16 "5001" FP-5001-MFG 0,28.5 r0 top
L1 "SRN8040-101M" BOUR-SRN8040-101M_V 62,18 r0 top
L2 "ADL32VHC-220M" FP-1210POC-MFG 64.5,19.5 r180 bottom value=22uH
L3 "PFL1609-561MEW" FP-PFL1609-MFG 62,22 r135 bottom value=0.56uH
L4 "SRN8040-101M" BOUR-SRN8040-101M_V 53,26 r90 top
L5 "ADL32VHC-220M" FP-1210POC-MFG 50,29 r180 bottom value=22uH
L6 "PFL1609-561MEW" FP-PFL1609-MFG 49,25.5 r270 bottom value=0.56uH
L7 "SRN8040-101M" BOUR-SRN8040-101M_V 53,36 r270 top
L8 "ADL32VHC-220M" FP-1210POC-MFG 50,33 r180 bottom value=22uH
L9 "PFL1609-561MEW" FP-PFL1609-MFG 49,36.5 r90 bottom value=0.56uH
L10 "SRN8040-101M" BOUR-SRN8040-101M_V 62,44 r0 top
L11 "ADL32VHC-220M" FP-1210POC-MFG 64.5,42.5 r180 bottom value=22uH
L12 "PFL1609-561MEW" FP-PFL1609-MFG 62,40 r225 bottom value=0.56uH
L13 "1255AY-3R9N=P3" FP-DG6045C-MFG 38,67 r0 top
MH1 "PTHV6" "PTHV6 M2" 72,72 r0 top net-tie
MH2 "PTHV6" "PTHV6 M2" 0,72 r0 top net-tie
MH3 "PTHV6" "PTHV6 M2" 72,0 r0 top net-tie
MH4 "PTHV6" "PTHV6 M2" 0,0 r0 top net-tie
MH5 "PTHV6" "PTHV6 M2" 72,45 r0 top net-tie
P1 "5-146280-2" TECO-5-146280-2_V 17,59 r270 top
P2 "5-146280-2" TECO-5-146280-2_V 40.54,0 r180 top
P4 "5-146280-2" TECO-5-146280-2_V 8,22.5 r180 top
P5 "5-146280-2" TECO-5-146280-2_V 8,19.5 r180 top
P7 "5-146280-2" TECO-5-146280-2_V 8,32.5 r180 top
P8 "5-146280-2" TECO-5-146280-2_V 8,29.5 r180 top
Q1 "SISH615ADN-T1-GE3" SISH615ADN-T1-GE3-Footprint-1 17,64 r90 top
Q2 "SISH615ADN-T1-GE3" SISH615ADN-T1-GE3-Footprint-1 17,54 r90 top
Q3 "FDC6327C" FAIR-SOT23-6_V 63,7 r0 bottom
R1 "100k" R0603B 17,66 r0 bottom
R2 "100k" R0603B 17,56 r0 bottom
R3 "100k" R0603B 39.5,25.5 r180 top
R4 "DNP" R0603B 3.5,21.75 r0 top
R5 "DNP" R0603B 3.5,20.25 r0 top
R6 "2.7k" R0603B 3.5,31.75 r0 top
R7 "2.7k" R0603B 3.5,30.25 r0 top
R8 "1k" R0603B 73,17.75 r180 top
R9 "1k" R0603B 73,16.25 r180 top
R10 "1k" R0603B 58,7 r90 bottom
R11 "100k" R0603B 59.5,7 r90 bottom
R12 "1k" R0603B 67.5,7 r90 bottom
R13 "100k" R0603B 66,7 r90 bottom
R14 "PE1206DRM7W0R05L" R1206B 53,15 r180 top value=100k
R15 "DNP" R0603B 35,40 r0 bottom
R16 "5.1k" R0603B 65,22 r0 bottom
R17 "10k" R0603B 32.5,40 r0 bottom
R18 "49.9" R0603B 41.45,22.85 r135 bottom
R19 "PE1206DRM7W0R05L" R1206B 53,19 r180 top value=100k
R20 "DNP" R0603B 35,22 r0 bottom
R21 "5.1k" R0603B 51.5,26.5 r0 bottom
R22 "402" R0603B 45,27.5 r180 bottom
R23 "10k" R0603B 32.5,22 r0 bottom
R24 "49.9" R0603B 42.85,24.25 r135 bottom
R25 "PE1206DRM7W0R05L" R1206B 53,43 r180 top value=100k
R26 "5.1k" R0603B 51.5,35.5 r0 bottom
R27 "49.9" R0603B 42.5,38.1 r225 bottom
R28 "PE1206DRM7W0R05L" R1206B 53,47 r180 top value=100k
R29 "5.1k" R0603B 65,40 r0 bottom
R30 "49.9" R0603B 41.1,39.5 r225 bottom
R31 "0" R0603B 65.75,55 r90 top
R32 "0" R0603B 67.25,55 r90 top
R33 "0" R0603B 68.75,55 r90 top
R34 "0" R0603B 70.25,55 r90 top
R35 "0" R0603B 61.25,55 r90 top
R36 "0" R0603B 59.75,55 r90 top
R37 "100k" R0603B 70,65.5 r270 top
R38 "0" R0603B 64.25,55 r90 top
R39 "100k" R0603B 67.5,67 r180 top
R40 "0" R0603B 62.75,55 r90 top
R41 "TBD" R0603B 60,63 r90 top value=100k
R42_REG_1 "VARIES" R0603B 42,61 r90 top (schematic designator R42)
R42_REG_2 "VARIES" R0603B 42,54 r90 top (schematic designator R42)
R43_REG_1 "100k" R0603B 24.5,60 r270 top (schematic designator R43)
R43_REG_2 "100k" R0603B 24.5,53 r270 top (schematic designator R43)
R44_REG_1 "100k" R0603B 42,58.5 r90 top value=10k (schematic designator R44)
R44_REG_2 "100k" R0603B 42,51.5 r90 top value=10k (schematic designator R44)
TP1 "TPAD6R" "New footprint 1" 34.19,0 r90 top
TP2 "TPAD6R" "New footprint 1" 36.73,0 r90 top
U1 "MAX96724FGTN/V+" MAX96724FGTN_V+-Footprint-1 34,31 r225 bottom
U2 "PAC1934T-I/JQ" FP-C04-257-MFG 65,62 r270 top
U3 "AP63203WU-7" FP-TSOT26-MFG 32,65.5 r0 top
U4_REG_1 "MCP1726T-ADJE/MF" DFN-MF8 32,60 r0 top (schematic designator U4)
U4_REG_2 "MCP1726T-ADJE/MF" DFN-MF8 32,53 r0 top (schematic designator U4)
Y1 "ABM8G-25.000MHZ-18-D2Y-T" FP-ABM8G-MFG 45,31 r270 bottom

## Footprints (in the part's own frame and the unit in brackets; to place one, negate y for a bottom-side part, rotate by r counter-clockwise, add the part's x,y. Pads: shape width x height; smd on the part's side, far side on the other; paste and mask are expansions set on the pad)
1-2834011-2-Footprint-1 [mil]
  round 62 / inner round 60 / far side round 62 hole 42 paste-99999 mask+0: 1(0,0) 2(137.8,-204.72)
  silkscreen extent -243,-402 206,92, body extent -132,-386 202,86, height 499
BOUR-SRN8040-101M_V [mm] "SMD, 2-Leads, Body 8x8mm"
  rect 2.2x8 smd: 1(-2.85,0) 2(2.85,0)
  silkscreen extent -1.35,-4 1.35,4, body extent -4,-4 4,4, height 4
DFN-MF8 [mm] "SON, 8-Leads, Body 3x3mm, Pitch 0.65mm, Microchip Recommended"
  rect 0.65x0.35 smd: 1(-1.55,0.975) 2(-1.55,0.325) 3(-1.55,-0.325) 4(-1.55,-0.975) 5(1.55,-0.975) 6(1.55,-0.325) 7(1.55,0.325) 8(1.55,0.975)
  rect 1.55x2.4 smd: 9(0,0)
  silkscreen extent -2.47,-1.7 1.7,1.82, body extent -1.55,-1.55 1.55,1.55, height 1
FAIR-SOT23-6_V [mm] "SOT23, 6-Leads, Body 2.9x1.6mm, Pitch 0.95mm"
  rect 1x0.7 smd: 1(-1.3,0.95) 2(-1.3,0) 3(-1.3,-0.95) 4(1.3,-0.95) 5(1.3,0) 6(1.3,0.95)
  silkscreen extent -1.42,-1.5 0.4,1.97, body extent -1.4,-1.45 1.4,1.45, height 1.45
FH34SRJ-22S-0.5SH(50)-Footprint-1 [mm]
  rect 0.3x0.8 smd paste-1: 1(5.25,1.25) 2(4.75,1.25) 3(4.25,1.25) 4(3.75,1.25) 5(3.25,1.25) 6(2.75,1.25) 7(2.25,1.25) 8(1.75,1.25) 9(1.25,1.25) 10(0.75,1.25) 11(0.25,1.25) 12(-0.25,1.25) 13(-0.75,1.25) 14(-1.25,1.25) 15(-1.75,1.25) 16(-2.25,1.25) 17(-2.75,1.25) 18(-3.25,1.25) 19(-3.75,1.25) 20(-4.25,1.25) 21(-4.75,1.25) 22(-5.25,1.25)
  rect 0.4x0.8 smd: S1(6.25,-1.25) S2(-6.25,-1.25)
  silkscreen extent -6.5,-1.8 6.5,2.65, body extent -6.5,-1.9 6.5,1.9, height 1
FM4-NZRP-PCB-1-Footprint-1 [mm]
  round 1.2 hole 0.7: 1(-1.91,-2) 2(2.09,-2) 3(2.09,2) 4(-1.91,2)
  round 2.1 hole 1.4: MH1(0,0)
  round 2.55 hole 1.7: MH2(-3.5,-4.575) MH3(4.6,-4.575) MH4(4.6,4.575) MH5(-3.5,4.575)
  silkscreen extent -5.9,-6.5 17.25,6.5, body extent -4.76,-5.99 17.8,5.99, height 15.79
FP-0402-L_1_0_0_05-W_0_5-IPC_A [mm]
  rect 0.715x0.672 smd paste+0 mask+0: 1(-0.479,0) 2(0.479,0)
  silkscreen extent -0.84,-0.74 0.84,0.74, body extent -0.5,-0.25 0.5,0.25, height 0.55
FP-0603-L_1_6_0_2-W_0_8_0-MFG [mm]
  rect 0.7x0.7 smd paste+0 mask+0: 1(-0.7,0) 2(0.7,0)
  silkscreen extent -0.9,-0.82 0.9,0.82, body extent -1.15,-0.6 1.15,0.6, height 0.25
FP-1210-L_3_2_0_3-W_2_5_0-IPC_B [mm]
  rect 1.553x2.706 smd paste+0 mask+0: 1(-1.325,0) 2(1.325,0)
  silkscreen extent -0.25,-1.35 0.25,1.35, body extent -2.35,-1.6 2.35,1.6, height 0.25
FP-1210-L_3_3_0_4-W_2_5_0-MFG [mm]
  rect 1x2.5 smd paste+0 mask+0: 1(-1.5,0) 2(1.5,0)
  silkscreen extent -0.62,-1.4 0.62,1.4, body extent -2.1,-1.5 2.1,1.5, height 0.25
FP-1210L050YR-MFG [mm]
  rect 1x2.5 smd paste+0 mask+0: 1(-1.5,0) 2(1.5,0)
  silkscreen extent -0.63,-1.4 0.63,1.4, body extent -2.1,-1.5 2.1,1.5, height 0.25
FP-1210POC-MFG [mm]
  rect 0.65x2.65 smd paste+0 mask+0: 1(-1.27,0) 2(1.27,0)
  silkscreen extent -0.57,-1.34 0.57,1.34, body extent -1.65,-1.34 1.65,1.34, height 3
FP-5001-MFG [mm]
  round 1.57 hole 1.016 paste-2539.97 mask+0: 1(0,0)
  silkscreen extent -1.35,-1.34 1.35,1.34, body extent -1.45,-1.45 1.45,1.45, height 0.25
FP-ABM8G-MFG [mm]
  rect 1.4x1.2 smd paste+0 mask+0: 1(-1.1,-0.85) 2(1.1,-0.85) 3(1.1,0.85) 4(-1.1,0.85)
  silkscreen extent -2.47,-1.83 1.6,1.83, body extent -1.6,-1.25 1.6,1.25, height 1
FP-C04-257-MFG [mm]
  rrect100% 0.8x0.35 smd paste+0 mask+0: 1(-2,0.975) 2(-2,0.325) 3(-2,-0.325) 4(-2,-0.975) 9(2,-0.975) 10(2,-0.325) 11(2,0.325) 12(2,0.975)
  rrect100% 0.35x0.8 smd paste+0 mask+0: 5(-0.975,-2) 6(-0.325,-2) 7(0.325,-2) 8(0.975,-2) 13(0.975,2) 14(0.325,2) 15(-0.325,2) 16(-0.975,2)
  rect 2.7x2.7 smd paste+0 mask+0: 17(0,0)
  silkscreen extent -3.1,-2.1 2.1,2.1, body extent -2.5,-2.5 2.5,2.5, height 0.25
FP-C0805C475J4RACAUTO-MFG [mm]
  rect 0.95x1.35 smd paste+0 mask+0: 1(-0.75,0) 2(0.75,0)
  silkscreen extent -1.15,-1.05 1.15,1.05, body extent -1.4,-0.85 1.4,0.85, height 0.25
FP-CES-109-01-G-S-MFG [mm]
  rect 1.31x1.31 hole 0.81 paste-2539.97 mask+0: 1(-10.16,0)
  round 1.31 hole 0.81 paste-2539.97 mask+0: 2(-7.62,0) 3(-5.08,0) 4(-2.54,0) 5(0,0) 6(2.54,0) 7(5.08,0) 8(7.62,0) 9(10.16,0)
  silkscreen extent -12.27,-1.59 11.55,1.59, body extent -11.65,-1.69 11.65,1.69, height 0.25
FP-DG6045C-MFG [mm]
  rect 1.6x5.7 smd paste+0 mask+0: 1(-2.35,0) 2(2.35,0)
  silkscreen extent -3.87,-3.15 1.17,3.15, body extent -3.25,-3.25 3.25,3.25, height 0.25
FP-GRM21B-0_2-e0_2_0_7-IPC_B [mm]
  rect 1.255x1.456 smd paste+0 mask+0: 1(-0.826,0) 2(0.826,0)
  silkscreen extent -1.45,-1.13 1.45,1.13, body extent -1,-0.63 1,0.63, height 1.45
FP-PFL1609-MFG [mm]
  rect 0.64x1.02 smd paste+0 mask+0: 1(-0.635,0) 2(0.635,0)
  silkscreen extent -0.9,-0.89 0.9,0.89, body extent -0.9,-0.54 0.9,0.54, height 0.95
FP-PJ-102A-MFG [mm]
  rect 3.2x1.6 hole 1 slot 2.6 at 0 deg paste-2539.97 mask+0: 1(0,-6.5)
  rrect100% 3.2x1.6 hole 1 slot 2.6 at 0 deg paste-2539.97 mask+0: 2(0,-0.5)
  rrect100% 1.6x3.2 hole 2.6 slot 1 at 0 deg paste-2539.97 mask+0: 3(-4.7,-3.5)
  silkscreen extent -4.6,-8.08 4.6,7.3, body extent -5.6,-7.4 4.7,7.4, height 0.25
FP-SF-1206FP-MFG [mm]
  rect 1.25x1.65 smd paste+0 mask+0: 1(-1.725,0) 2(1.725,0)
  silkscreen extent -0.72,-0.82 0.72,0.82, body extent -2.45,-0.92 2.45,0.92, height 0.25
FP-TSOT26-MFG [mm]
  rect 1x0.7 smd paste+0 mask+0: 1(-1.099,0.95) 2(-1.099,0) 3(-1.099,-0.95) 4(1.099,-0.95) 5(1.099,0) 6(1.099,0.95)
  silkscreen extent -2.32,-1.5 0.22,1.5, body extent -1.7,-1.6 1.7,1.6, height 0.25
MAX96724FGTN_V+-Footprint-1 [mm]
  oval 0.95x0.25 smd: 1(-3.875,3.25) 2(-3.875,2.75) 3(-3.875,2.25) 4(-3.875,1.75) 5(-3.875,1.25) 6(-3.875,0.75) 7(-3.875,0.25) 8(-3.875,-0.25) 9(-3.875,-0.75) 10(-3.875,-1.25) 11(-3.875,-1.75) 12(-3.875,-2.25) 13(-3.875,-2.75) 14(-3.875,-3.25) 29(3.875,-3.25) 30(3.875,-2.75) 31(3.875,-2.25) 32(3.875,-1.75) 33(3.875,-1.25) 34(3.875,-0.75) 35(3.875,-0.25) 36(3.875,0.25) 37(3.875,0.75) 38(3.875,1.25) 39(3.875,1.75) 40(3.875,2.25) 41(3.875,2.75) 42(3.875,3.25)
  oval 0.25x0.95 smd: 15(-3.25,-3.875) 16(-2.75,-3.875) 17(-2.25,-3.875) 18(-1.75,-3.875) 19(-1.25,-3.875) 20(-0.75,-3.875) 21(-0.25,-3.875) 22(0.25,-3.875) 23(0.75,-3.875) 24(1.25,-3.875) 25(1.75,-3.875) 26(2.25,-3.875) 27(2.75,-3.875) 28(3.25,-3.875) 43(3.25,3.875) 44(2.75,3.875) 45(2.25,3.875) 46(1.75,3.875) 47(1.25,3.875) 48(0.75,3.875) 49(0.25,3.875) 50(-0.25,3.875) 51(-0.75,3.875) 52(-1.25,3.875) 53(-1.75,3.875) 54(-2.25,3.875) 55(-2.75,3.875) 56(-3.25,3.875)
  rect 4.7x4.7 smd: 57(0,0)
  silkscreen extent -4.97,-4.2 4.2,4.2, body extent -4.05,-4.05 4.05,4.05, height 0.8
"New footprint 1" [mm]
  round 0.6 smd paste-1: 1(0,0)
ONSC-SOD-123-2-425-04_V [mm] "SOD, 2-Leads, Body 2.69x1.6mm"
  rect 0.91x1.22 smd: 1(-1.635,0) 2(1.635,0)
  silkscreen extent -1.76,-0.8 0.78,1.28, body extent -1.35,-0.8 1.35,0.8, height 1.35
"PTHV6 M2" [mm]
  round 5 hole 2.5: 1(0,0)
  round 0.5 hole 0.3: 2(0,1.9) 3(1.344,1.344) 4(1.9,0) 5(1.344,-1.344) 6(0,-1.9) 7(-1.9,0) 7(-1.344,-1.344) 7(-1.344,1.344)
R0603B [mm] "Chip Resistor, 0603, 2-Leads, Body 1.58x0.85mm, IPC Medium Density"
  rrect25% 0.8x0.95 smd: 1(-0.65,0) 2(0.65,0)
  silkscreen extent -0.2,-0.7 0.2,0.7, body extent -0.82,-0.48 0.82,0.48, height 0.5
R1206B [mm] "Chip Resistor, 1206, 2-Leads, Body 3.20x1.60mm, IPC Medium Density"
  rrect25% 1.2x1.75 smd: 1(-1.45,0) 2(1.45,0)
  silkscreen extent -0.6,-1 0.6,1, body extent -1.7,-0.87 1.7,0.87, height 0.6
SISH615ADN-T1-GE3-Footprint-1 [mm]
  rect 0.35x0.5 smd paste+0 mask+0: 1(-0.937,-1.4) 2(-0.288,-1.4) 3(0.363,-1.4) 4(1.012,-1.4)
  round 0.025 smd mask+0: 5-6-7-8(0.038,0.51)
  Top Layer region: -1.187,-0.63 -1.187,-0.215 -1.568,-0.215 -1.568,0.215 -1.187,0.215 -1.187,1.35 -1.137,1.35 -1.137,1.65 -0.737,1.65 -0.737,1.35 -0.487,1.35 -0.487,1.65 -0.088,1.65 -0.088,1.35 0.163,1.35 0.163,1.65 0.563,1.65 0.563,1.35 0.813,1.35 0.813,1.65 1.212,1.65 1.212,1.35 1.262,1.35 1.262,0.215 1.643,0.215 1.643,-0.215 1.262,-0.215 1.262,-0.63
  silkscreen extent -1.51,-2.38 1.59,-1.01, body extent -1.67,-1.75 1.74,1.75, height 0.25
TECO-5-146280-2_V [mm] "Connector, 2-Leads, Body 4.67x2.34mm, Pitch 2.54mm"
  rect 1.4x1.4 hole 0.89: 1(-1.27,0)
  round 1.4 hole 0.89: 2(1.27,0)
  silkscreen extent -2.33,-1.17 2.33,1.94, body extent -2.34,-1.17 2.34,1.17, height 5.33
WL-SBCD_0606 [mm] "SMT Bi-color Chip LED Diffuesed, body 1.5x1.6mm"
  rect 0.5x0.8 smd: 1(-0.45,0.8) 2(-0.45,-0.8) 3(0.45,-0.8) 4(0.45,0.8)
  silkscreen extent -0.07,1.48 0.07,1.63, body extent -0.75,-0.8 0.75,0.8, height 0.55

## Part data
C5 C7 C8 C9 C11 C12 C13 C14 C15 C17 C18 C19 C21 C22 C23 C24 C25 C26 C27 C28 C29 C30 C31 C32 C33 C34 C35 C36 C37 C38 C39 C40 C41 C42 C43 C44 C45 C46 C50 C59_REG_1 C59_REG_2: library part CMP-001-00058-1, "LARGE PADS, 0402 CAP, CHANGE COMMENT TO MATCH REAL P/N", Capacitor Type=Ceramic, Case/Package=0402, Max Operating Temperature=85°C, Min Operating Temperature=-55°C, Mounting Technology="Surface Mount", Pins=2, RoHS Compliant=Yes
C6 C10 C16 C20 C53 C54: library part CMP-2007-03222-3, "Chip Multilayer Ceramic Capacitors for General Purpose, 0805, 22uF, X5R, 15%, 20%, 25V", Capacitance=22uF, Case Code (Imperial)=0805, Case Code (Metric)=2012, Dielectric=X5R, Max Operating Temperature=85°C, Min Operating Temperature=-55°C, Package Quantity=3000, Resistor Type=Ceramic, Tolerance=20%, Voltage=25V, Case/Package=0805, Depth=1.25mm, Height=1.25mm, Lead Free="Lead Free", Length=2mm, Material=Ceramic, Mount="Surface Mount", Packaging="Tape and Reel", REACH SVHC="No SVHC", Termination=SMD/SMT, Thickness=0.057inch, Voltage Rating=25V, Voltage Rating (DC)=25V, Weight=0.000335oz, Width=1.25mm
C47 C48 C49: library part CMP-2000-06226-4, "Multilayer Ceramic Capacitor 10uF 16V X5R 20% SMD 0603 T/R", Capacitance=10uF, Case Code (Imperial)=0603, Case Code (Metric)=1608, Dielectric=X5R, Max Operating Temperature=85°C, Min Operating Temperature=-55°C, Package Quantity=1, Tolerance=20%, Voltage Rating=16V, Case/Package=0603, Construction=Flat, Halogen Free="Halogen Free", Height=0.8mm, Length=0.063inch, Mount="Surface Mount", Packaging="Tape and Reel", RoHS Compliant=Yes, Series=M, Termination=SMD/SMT, Thickness=0.031inch, Voltage Rating (DC)=16V, Width=0.031inch
C51 C52: library part CMP-2000-05477-2, "General Purpose Ceramic Capacitor, 1210, 10uF, 10%, X5R, 15%, 25V", Capacitance=10uF, Case Code (Imperial)=1210, Case Code (Metric)=3225, Dielectric=X5R, Max Operating Temperature=85°C, Min Operating Temperature=-55°C, Package Quantity=1, Tolerance=10%, Voltage=25V, Case/Package=1210, Construction=Flat, Contact Plating=Tin, Depth=2.5mm, Height=2.29mm, Lead Free="Lead Free", Length=3.2mm, Mount="Surface Mount", Packaging="Tape and Reel", Radiation Hardening=No, REACH SVHC="No SVHC", RoHS Compliant=Yes, Series=-, Termination=SMD/SMT, Thickness=0.11inch, Voltage Rating=25V, Voltage Rating (DC)=25V, Width=0.098inch
C55_REG_1 C55_REG_2 C56_REG_1 C56_REG_2: library part CMP-00212-84766729-1, "C0805C475J4RACAUTO Cap Ceramic 4.7uF 16V X7R 5% Pad SMD 0805 125C Automotive T/R", Capacitance=4.7µF, Case/Package=0805, Dielectric=X7R, Dielectric Material=Ceramic, Max Operating Temperature=125°C, Min Operating Temperature=-55°C, Tolerance=5%, Voltage Rating=16V, Height=1.4mm, Material=Ceramic, NexarPartId=84766729, Packaging="Cut Tape", RoHS=Compliant, Voltage Rating (DC)=16V
C57_REG_1 C57_REG_2 C58_REG_1 C58_REG_2: library part CMP-14477-002774-2, "None", Capacitance=1uF, Case Code (Imperial)=1210, Case Code (Metric)=3225, Dielectric=X5R, Max Operating Temperature=125°C, Min Operating Temperature=-55°C, Package Quantity=1, Resistor Type=Ceramic, Tolerance=10%, Voltage=100V, Case/Package=1210, Construction=Flat, Depth=2.5mm, Halogen Free="Halogen Free", Height=1.9mm, Length=3.2mm, Mount="Surface Mount", Number of Pins=2, Packaging="Tape and Reel", Radiation Hardening=No, REACH SVHC="No SVHC", RoHS Compliant=Yes, Series=M, Termination=SMD/SMT, Thickness=0.083inch, Voltage Rating=100V, Voltage Rating (DC)=100V, Width=2.5mm
D1 D2: library part CMP-1060-00565-1, "Zener Voltage Regulator, 500 mW, 2-Pin SOD-123, Pb-Free, Tape and Reel", Manufacturer="On Semiconductor", ComponentLink1Description="Manufacturer URL", ComponentLink1URL=http://www.onsemi.com/, ComponentLink2Description=Datasheet, ComponentLink2URL=http://www.onsemi.com/pub_link/Collateral/MMSZ5221BT1-D.PDF, ComponentLink3Description="Package Specification", ComponentLink3URL=http://www.onsemi.com/pub_link/Collateral/425-04.PDF, DatasheetVersion="Rev. 12", Mounting Technology="Surface Mount", P Max (W)=0.5, PackageDescription="2-Pin SOD, Body 1.6 x 2.69 mm", PackageReference=SOD-123-2-425-04, PackageVersion="Rev. G, 10/2009", Packing="Tape and Reel", PartNumber=MMSZ5242BT1G, RoHS=Pb-Free, VZ Typ (V)=12
D5: library part CMP-004-00040-2, "Led, Red/Grn, 180Mcd/230Mcd, 624Nm/525Nm Rohs Compliant: Yes", Component Type=Standard, Design Item ID=CMP-004-00034-2, Pins=4, Source=rgled.SchLib
F1 F2: library part CMP-07399-000013-1, "FUSE BOARD MOUNT 2A 63VDC 1206", Case Code (Imperial)=1206, Case Code (Metric)=3216, Current Rating=2A, Max Operating Temperature=105°C, Min Operating Temperature=-20°C, Voltage Rating (DC)=63V, Approvals=UL, Case/Package=1206, Fuse Type="Board Mount (Cartridge Style Excluded)", Mount="Surface Mount", Packaging="Cut Tape", RoHS Compliant=Yes, Series="SinglFuse™ SF-1206FP"
F3 F4 F5 F6: library part CMP-08606-000067-1, "PTC RESET FUSE 13.2V 500MA 1210", Case Code (Imperial)=1210, Case Code (Metric)=3225, Current Rating=100A, Hold Current=500mA, Max Operating Temperature=85°C, Max Power Dissipation=600mW, Max Voltage Rating (DC)=13.2V, Min Operating Temperature=-40°C, Package Quantity=4000, Resistance=900mR, Trip Current=1A, Approvals=cULus, Case/Package=1210, Height=0.85mm, Lead Free="Lead Free", Length=3.43mm, Max Current Rating=100A, Operating Supply Voltage=13.2V, Packaging="Tape and Reel", Power Dissipation=600mW, REACH SVHC="No SVHC", Terminal Material=Copper, Termination=SMD/SMT, Time to Trip=0.1s, Voltage Rating=13.2V, Voltage Rating (DC)=13.2V, Width=2.8mm, Working Voltage=13.2V
J1 J6: library part CMP-002-00067-1, "Barrier Strip Terminal Block", RoHS Compliant=Yes
J2 J3 J4 J5 J7 J8 J13 J14 J15 J16: library part CMP-2000-05181-2, "PC TEST POINT MINIATURE BLACK", Color=Black, Flammability Rating="UL94 V-0", Package Quantity=100, Body Material=Bronze, Contact Material=Bronze, Contact Plating=Silver, Diameter=2.54mm, Height=0.3inch, Hole Diameter=1.6mm, Housing Color=Black, Inside Diameter=1.27mm, Insulation=Insulated, Insulation Material=Nylon, Lead Free="Lead Free", Length=7.62mm, Material=Nylon, Mount="Through Hole", Number of Contacts=1, Number of Ports=1, Orientation=Straight, Outside Diameter=2.54mm, Packaging=Bulk, Plating=Silver, REACH SVHC="No SVHC", RoHS Compliant=Yes, Series=THM, Termination="Through Hole"
J9: library part CMP-002-00104-1, "0.5Mm Pitch, 1.0Mm Height, Top And Bottom Contact, Back-Flip", Max Operating Temperature=105°C, Min Operating Temperature=-55°C, Connector Type=Receptacle, Mounting Technology="Surface Mount", Pins=22
J10: library part CMP-002-00044-4, "Connector RF Mini-FAKRA Plug 9GHz 50Ohm Solder Right Angle Through Hole", Component Type=Standard, Design Item ID=CMP-002-00085-1, Pins=9, Source=fakra4ch.SchLib
J11: library part CMP-00575-09340057-1, "CES-109-01-G-S Conn Socket Strip SKT 9 POS 2.54mm Solder ST Top Entry Thru-Hole Tube", Contact Resistance=10mΩ, Current Rating=5.5A, Housing Color=Black, Manufacturer Lifecycle Status=PRODUCTION, Max Current Rating=1A, Max Operating Temperature=125°C, Max Voltage Rating (AC)=333V, Min Operating Temperature=-55°C, Voltage Rating=400V, Contact Material="Bronze, Gold, Nickel", Contact Plating=Gold, Depth=3.05mm, Gender=Receptacle, Height=5.21mm, Housing Material=Polyester, Length=22.86mm, Lifecycle Status=Production, NexarPartId=9340057, Number of Contacts=9, Number of Rows=1, Orientation=Straight, Pitch=2.54mm, Radiation Hardening=No, REACH SVHC="No SVHC", RoHS=Compliant, Termination=Solder
J12: library part CMP-12637-106234071-1, "PJ-102A 2.0 x 6.5 mm, 2.5 A, Horizontal, Through Hole, Tapered Pins, Dc Power Jack Connector", Color=Black, Current Rating=2.5A, Flammability Rating="UL94 V-0", Insulation Resistance=50MΩ, Max Operating Temperature=85°C, Min Operating Temperature=-25°C, Voltage Rating=24V, Contact Gender=Male, Contact Material="Copper, Nickel, Tin", Contact Plating=Nickel, Diameter=2.1mm, Gender=Male, Height=11.2mm, Housing Color=Black, Housing Material=Thermoplastic, Inside Diameter=2mm, Lead Free="Lead Free", Lifecycle Status=Production, Mount="Through Hole", NexarPartId=106234071, Number of Conductors=2, Number of Contacts=3, Orientation=Horizontal, Outside Diameter=6.5mm, Packaging=Bulk, RoHS=Compliant, Schedule B="8536695050, 8536695050", Shielding=No, Termination="Through Hole", Voltage Rating (DC)=24V
L1 L4 L7 L10: library part CMP-2000-07143-1, "Semi-Shielded Power Inductor, 100 uH, -40 to 125 degC, 2-Pin SMD, RoHS, Tape and Reel", Current, Rating="1 /  / A", Inductance="100 /  / µH", Manufacturer=Bourns, Package Description="2-Pin Surface Mount Device, Body 8 x 8 mm", Tolerance="±20 /  / %", Brand/Series=SRN8040Series, Datasheet URL=http://www.produktinfo.conrad.com/datenblaetter/1000000-1099999/001056456-da-01-en-MAG_ABG_LEIST_IND_SRN8040_101M_100UH_SMD.pdf, Datasheet Version=08/2013, Manufacturer URL=http://www.bourns.com/, Mounting Technology=SurfaceMount, Package Reference=SRN8040-101M, Termination=SMT, Type=Power
L2 L5 L8 L11: library part CMP-11268-000041-1, "NOT COILCRAFT - ACTUAL P# --> ADL32VHC-220M /  - Power Injection Chokes for PoC", Ambient Temperature Range High=+125°C, Ambient Temperature Range Low=-40°C, Inductance=22uH, Manufacturer=coilcraft, Manufacturer Part Number=1210POC-223MRC, Package=1210POC, Rms Current=700mA, Saturation Current=720mA, Self Resonant Frequency=70MHz, Series Resistance=0.88Ω, Test Frequency=100kHz, Tolerance=20%, Automotive=Yes, Automotive Grade="Grade 1", Category=Ind, ComponentLink2Description=Datasheet, ComponentLink2URL=https://drive.google.com/open?id=15FlOq8Y4YbRFohfA_cJ40jgnqs8va2Mh, Core Material=Ferrite, Device Class L1="Passive Components", Device Class L2=Inductors, Device Class L3="Fixed Inductors", Height=3mm, Lead Free=Yes, Octopart=https://octopart.com/1210poc-223mrc-coilcraft-103207315, RoHS=TRUE
L3 L6 L9 L12: library part CMP-11268-000007-1, "Fixed Inductors PFL1609 Low Profile 0.56 uH 20 % 1.4 A", Ambient Temperature Range High=+105°C, Ambient Temperature Range Low=-40°C, Inductance=0.56uH, Manufacturer=coilcraft, Package=PFL1609, Rms Current=1100mA, Saturation Current=710mA, Self Resonant Frequency=600MHz, Series Resistance=130mΩ, Test Frequency=7.9MHz, Tolerance=20%, Automotive=Yes, Automotive Grade="Grade 1", Category=Ind, ComponentLink2Description=Datasheet, ComponentLink2URL=https://www.coilcraft.com/pdfs/pfl1609.pdf, Composition=Wirewound, Core Material=Composite, Device Class L1="Passive Components", Device Class L2=Inductors, Device Class L3="Fixed Inductors", Height=0.95mm, Lead Free=Yes, Manufacturer Part Number=PFL1609-561MEW, Mouser Description="Fixed Inductors PFL1609 Low Profile 0.56 uH 20 % 1.4 A", Octopart=https://octopart.com/pfl1609-561mew-coilcraft-20329171, RoHS=TRUE, Shielding=true
L13: library part CMP-06042-002684-1, "Shielded Wirewound Inductor 3.9uH 30% 4200mA 0.0264Ω SMD", Case/Package=Nonstandard, Current Rating=4.2A, DC Resistance (DCR)=26.4mR, Inductance=3.9uH, Max Operating Temperature=85°C, Min Operating Temperature=-40°C, Resistor Type=Wirewound, Saturation Current=4.7A, Test Frequency=100kHz, Tolerance=30%, Core Material=Ferrite, Height - Seated (Max)=0.177inch, Length=0.248inch, Mount="Surface Mount", Packaging="Tape and Reel", Shielding=Shielded, Width=0.248inch
MH1 MH2 MH3 MH4 MH5: library part CMP-00028-00001-13, "Plated mounting hole with 6 peripheral vias. This is a generic symbol that groups all relevant footprints."
P1 P2 P4 P5 P7 P8: library part CMP-2000-07492-1, "Male Header, Pitch 2.54 mm, 1 x 2 Position, Height 8.21 mm, Tail Length 3.05 mm, -65 to 105 degC, RoHS, Bulk", Case\/Package=100, Colour=Black, Current Rating=3A, Flammability Rating=UL94V-0, High Temperature Housing=Yes, Manufacturer="TE Connectivity", Max Current Rating=5A, Max Operating Temperature=105degC, Min Operating Temperature=-65degC, Package Description="Male Header, Pitch 2.54 mm, 1 x 2 Position, Height 8.21 mm, Tail Length 3.05 mm", Package Quantity=500, Approvals=CSA, Board Standoff=No(Without), Connector Type=Header, Contact Gender=Male, Contact Material=CopperAlloy, Contact Mating Length=0.23inch, Contact Plating=Matte, Contact Protection=No(Without), Contact Shape=Square, Datasheet URL=http://www.te.com/commerce/DocumentDelivery/DDEController?Action=showdoc&DocId=Customer+Drawing%7F146280%7FH1%7Fpdf%7FEnglish%7FENG_CD_146280_H1.pdf%7F5-146280-2, Datasheet Version="Rev. H1, 08/2016", Depth=2.34mm, Gasket=No(Without), High Speed Serial Data Connector=No, Housing Colour=Black, Housing Material=Polymer, Keyed=No, Length=4.67mm, Manufacturer URL=http://www.te.com/, Mating Alignment=No(Without), Mating Connector Lock=No(Without), Mating Post Length=0.23inch, Mount=ThroughHole, Mounting Technology=ThroughHole, Number of Contacts=2, Number of Positions=2, Number of Rows=1, Orientation=Straight, Package Reference=5-146280-2, Packaging=Carton, Panel Mount Retention=No(Without), PCB Mount Retention=Without, PCB Mounting Orientation=Vertical, PCB Thickness=0.063inch, Pitch=2.54mm, Radiation Hardening=No, RoHSCompliant=true, Row Spacing=2.54mm, Selectively Loaded=No(Without), Stabilizers=No(Without), Termination=ThroughHole, Termination Post Length=0.12inch
Q1 Q2: library part CMP-013-00018-2, "Trans MOSFET P-CH 20V 22.1A 8-Pin PowerPAK 1212 EP T/R", Component Type=Standard, Design Item ID=CMP-013-00036-4, Pins=5, Source=SISH615ADN-T1-GE3.SchLib
Q3: library part CMP-2000-04939-1, "Dual N & P-Channel 2.5 V Specified PowerTrench(TM) MOSFET, -55 to 150 degC, 6-Pin SOT-23, RoHS, Tape and Reel", Manufacturer=Fairchild, Maximum Continuous Drain Current=2.7@NChannel, Maximum Drain Source Voltage=20V, Maximum Gate Source Voltage=±8V, Operating Temperature=-55to150degC, Package=6SuperSOT, Package Description="6-Pin Small Outline Transistor, Body 2.9 x 1.6 mm, Pitch 0.95 mm", Package Reference=SOT23-6, Package Version="Rev. 5, 05/2015", Category=MOSFET, Channel Mode=Enhancement, Channel Type=N, Datasheet URL=https://www.fairchildsemi.com/datasheets/FD/FDC6327C.pdf, Datasheet Version="Rev. E, 07/2000", Manufacturer URL=https://www.fairchildsemi.com/, Mounting=SurfaceMount, Package URL=https://www.fairchildsemi.com/package-drawings/MA/MA06A.pdf, Packaging=Tape&Reel, Rad Hard=No, RDS-on=80@4.5V@NChannel, Typical Fall Time=3@NChannel, Typical Rise Time=9@NChannel, Typical Turn-Off Delay Time=12@NChannel, Typical Turn-On Delay Time=5@NChannel
R1 R2 R3 R4 R5 R6 R7 R8 R9 R10 R11 R12 R13 R15 R16 R17 R18 R20 R21 R22 R23 R24 R26 R27 R29 R30 R31 R32 R33 R34 R35 R36 R37 R38 R39 R40 R41 R42_REG_1 R42_REG_2 R43_REG_1 R43_REG_2 R44_REG_1 R44_REG_2: library part CMP-009-00002-14, "Resistor"
R14 R19 R25 R28: library part CMP-009-00002-14
TP1 TP2: library part CMP-00025-3, "Test Point .6mm"
U1: library part CMP-015-00011-4, "Quad Tunneling GMSL2/1 to CSI-2 Deserializer"
U2: library part CMP-06317-000025-1, "QUAD HIGH-SIDE CURRENT SENSOR", Max Operating Temperature=85°C, Min Operating Temperature=-40°C, Accuracy=1%, Mount="Surface Mount", Packaging="Cut Tape", RoHS Compliant=No
U3: library part CMP-12757-000006-1, "IC REG BUCK 3.3V 2A TSOT26", Ambient Temperature Range High=+85°C, Ambient Temperature Range Low=-40°C, Manufacturer="Diodes Inc.", Max Junction Temp=+160°C, Max Supply Voltage=32V, Min Supply Voltage=3.8V, Nominal Supply Current=22uA, Output Current=2A, Output Voltage=3.3V, Package=TSOT26, Switching Frequency=1.1MHz, Temperature="to +160°C", Automotive=No, Category=IC, ComponentLink2Description=Datasheet, ComponentLink2URL=https://www.diodes.com/assets/Datasheets/AP63200-AP63201-AP63203-AP63205.pdf, Device Class L1="Integrated Circuits (ICs)", Device Class L2="Power Management ICs", Device Class L3="Voltage Regulators - Switching", Digikey Description="IC REG BUCK 3.3V 2A TSOT26", Footprint Url=https://www.diodes.com/assets/Package-Files/TSOT26.pdf, Height=1mm, Lead Free=Yes, Manufacturer Part Number=AP63203WU-7, Mouser Description="AP63203 Series 3.3 V 2 A SMT Fixed Low IQ Synchronous Buck - TSOT-26", Number Of Outputs=1, Octopart=https://octopart.com/ap63203wu-7-diodes+inc.-98099550, Output Type=Fixed, RoHS=TRUE, Standoff Height=0.01mm, Switching Topology=Buck, Temperature Range High=+160°C
U4_REG_1 U4_REG_2: library part CMP-0136-00358-1, "1A, Low Voltage, Low Quiescent Current LDO Regulator, 8-Pin DFN, Extended Temperature, Tape and Reel", DatasheetVersion="revC, Aug-2007", PackageDescription="8-Lead Plastic Dual Flat, No Lead Package (MF) - 3x3x0.9mm Body [DFN]", PackageReference=DFN-MF8, PackageVersion="revBB, Aug-2009"
Y1: library part CMP-2000-05733-3, "Crystal 25MHz ±20ppm (Tol) ±30ppm (Stability) 18pF FUND 60Ω 4-Pin SMD T/R", Case/Package=CSMD, ESR (Equivalent Series Resistance)=60R, Frequency=25MHz, Frequency Stability=30ppm, Frequency Tolerance=20ppm, Load Capacitance=18pF, Max Operating Temperature=85°C, Min Operating Temperature=-40°C, Operating Frequency="25 MHz", Package Quantity=1000, Depth=2.5mm, Height=0.039inch, Lead Free="Lead Free", Length=3.2mm, Mount="Surface Mount", Number of Pins=4, Packaging="Tape and Reel", Radiation Hardening=No, Series=ABM8G, Series Resistance=60R, Termination=SMD/SMT, Tolerance=20ppm, Width=0.098inch

## Via types
v1: diameter 0.5, hole 0.3, Top Layer to Bottom Layer, tented both sides, 205 vias
v2: diameter 0.66, hole 0.33, Top Layer to Bottom Layer, tented both sides, 4 vias

## Nets (pads, with @x,y where several pads share a name; then routed paths per layer and width w, separated by ;. In a path a pad name is that pad's centre, name@x,y a point inside that pad or via, vN(x,y) a via of type N, cw(c..) or ccw(c..) an arc to the next point about the centre after c; other vN are vias at no path point)
1V2: C34.2 C35.2 C37.2 C38.2 C45.2 C46.2 C49.1 C57_REG_2.1 C58_REG_2.1 J7.1 R42_REG_2.2 U1.30 U1.55 U1.56 U4_REG_2.8 | length 16.6
  Top Layer w0.217: C58_REG_2.1@39.5,54.325 39.825,54.65 R42_REG_2.2@42,54.65
  Top Layer w0.3: v1(36.75,55.5) 46.5,55.5 J7.1@48,54
  Bottom Layer w0.25: v1(32,24.75) 32.011,24.761 32.011,25.122 U1.30@33.205,26.315
  other v1: 32,36.25 31.5,37 32.25,37 33,37 35.25,55.5 36,55.5
1V8: C39.2 C40.2 C41.2 C42.2 C48.1 C57_REG_1.1 C58_REG_1.1 J5.1 R42_REG_1.2 U1.7 U1.21 U4_REG_1.8 | length 15
  Top Layer w0.25: C58_REG_1.1@39.5,61.325 39.825,61.65 R42_REG_1.2@42,61.65
  Top Layer w0.3: v1(40.25,62.5) 46.5,62.5 J5.1@48,61
  Bottom Layer w0.25: U1.7@36.563,33.917 37.852,35.206 37.852,35.452 v1(37.9,35.5) ; U1.21@36.917,28.437 37.952,27.401 37.952,27.048 v1(38,27)
  other v1: 36.75,40.75 37.5,40.75 38.25,40.75 38.75,62.5 39.5,62.5
3V3: C26.2 C27.2 C43.2 C44.2 C47.1 C53.1 C54.1 C55_REG_1.1 C55_REG_2.1 C56_REG_1.1 C56_REG_2.1 D5.2 J4.1 L13.2 Q3.2 R3.2 R4.2 R5.2 R6.2 R7.2 R11.1 R15.2 R20.2 R37.2 R39.2 R43_REG_1.1 R43_REG_2.1 U1.24 U2.2 U2.15 U3.1 U4_REG_1.1 U4_REG_1.2 U4_REG_2.1 U4_REG_2.2 | length 187.4
  Top Layer w0.2: R5.2@4.15,20.25 4.443,20.543 4.443,20.943 v1(4.5,21) 4.443,21.057 4.443,21.457 R4.2@4.15,21.75 ; R7.2@4.15,30.25 4.443,30.543 4.443,30.943 v1(4.5,31) 4.443,31.057 4.443,31.457 R6.2@4.15,31.75 ; R43_REG_2.1@24.5,53.65 26.4,53.65 v1(26.5,53.75) ; R43_REG_1.1@24.5,60.65 25.569,60.65 25.669,60.75 v1(25.75,60.75) v1(26.5,60.75) ; U3.1@30.9,66.45 30.9,69.15 32.75,71 38.4,71 40.35,69.05 L13.2@40.35,67 ; 36.5,25.5 R3.2@38.85,25.5 ; v1(60.75,7) 61.25,7.5 64.8,7.5 65,7.7 65,8.073 70,13.073 70,16.8 69.5,17.3 D5.2@69.5,17.5 ; C26.2@65.479,67 R39.2@66.85,67 ; 69.25,62.5 69.25,64.1 69.625,64.475 69.625,64.55 69.925,64.85 R37.2@70,64.85
  Top Layer w0.3: v1(43,67.75) 43.25,68 J4.1@48,68
  Mid Layer 1 w0.5: v1(4.5,21) v1(4.5,31) 4.5,33 25.25,53.75 v1(25.75,53.75) 25.75,34.25 33,27 35.25,27 v1(36.5,25.75) 36.5,21.5 44.5,13.5 54.25,13.5 v1(60.75,7)
  Bottom Layer w0.2: v1(27.25,53.75) 35.65,45.35 R15.2@35.65,40 ; R20.2@35.65,22 35.65,22.075 36.5,22.925 v1(36.5,25.75) ; R11.1@59.5,6.35 59.575,6.35 60.225,7 v1(60.75,7) Q3.2@61.7,7
  Bottom Layer w0.25: U1.24@35.856,27.376 36.5,26.732 v1(36.5,25.75)
  other v1: 27.25,60.75 71.25,62.5 43,66.25 43,67 65.5,68.25